# EAGLE board SparkFun_PiMicro-RP2040-Panel (EAGLE 9.6.2), part 1 of 6
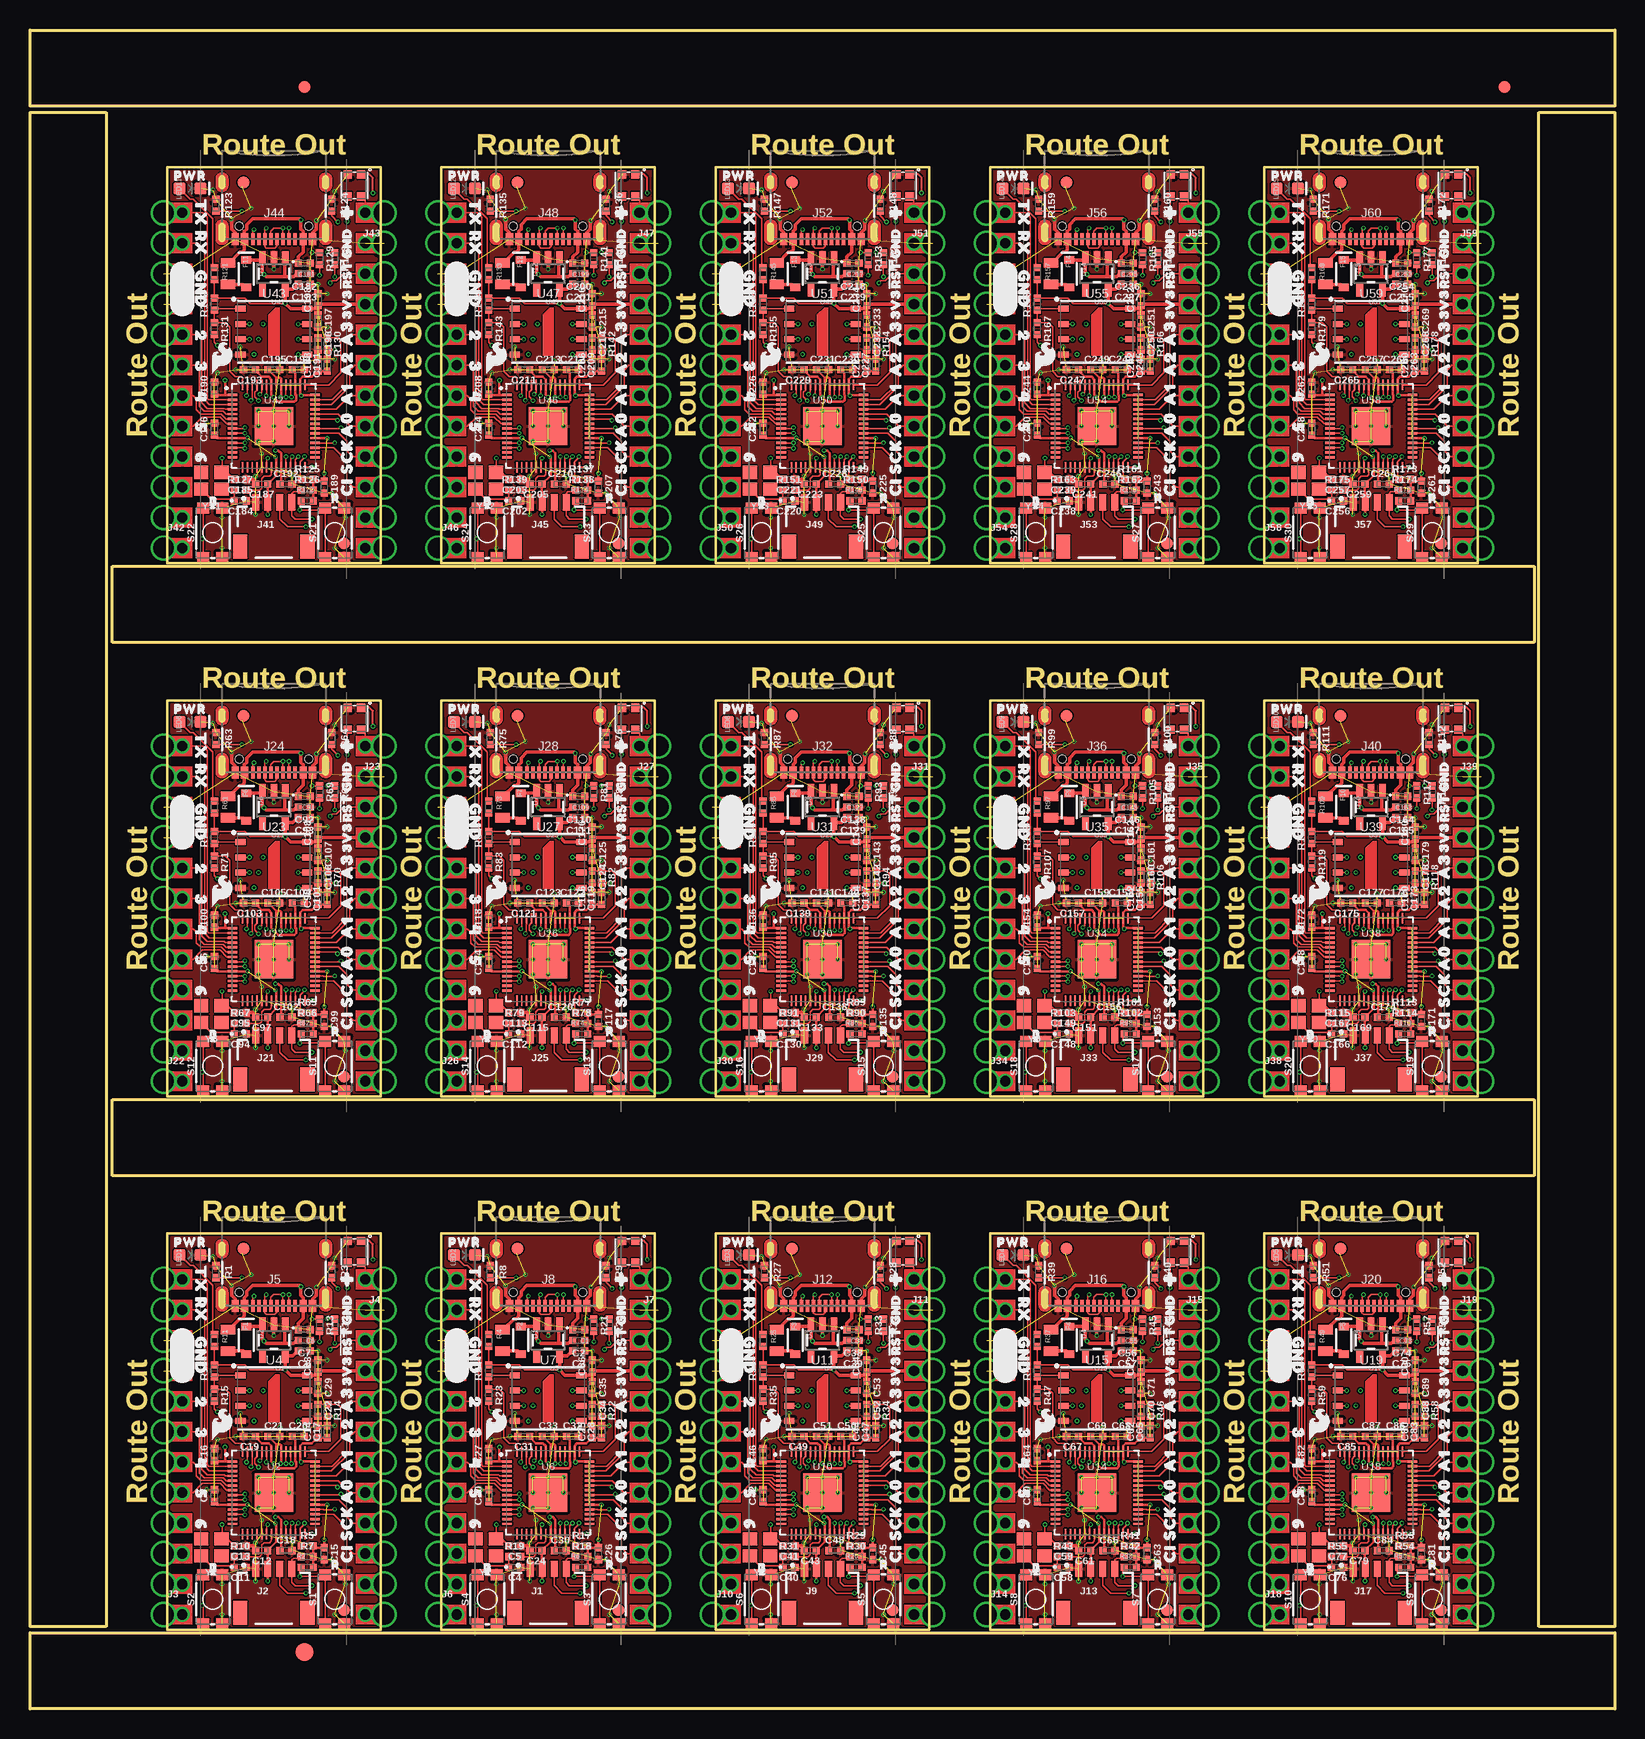
[diagram p0: board, top side]
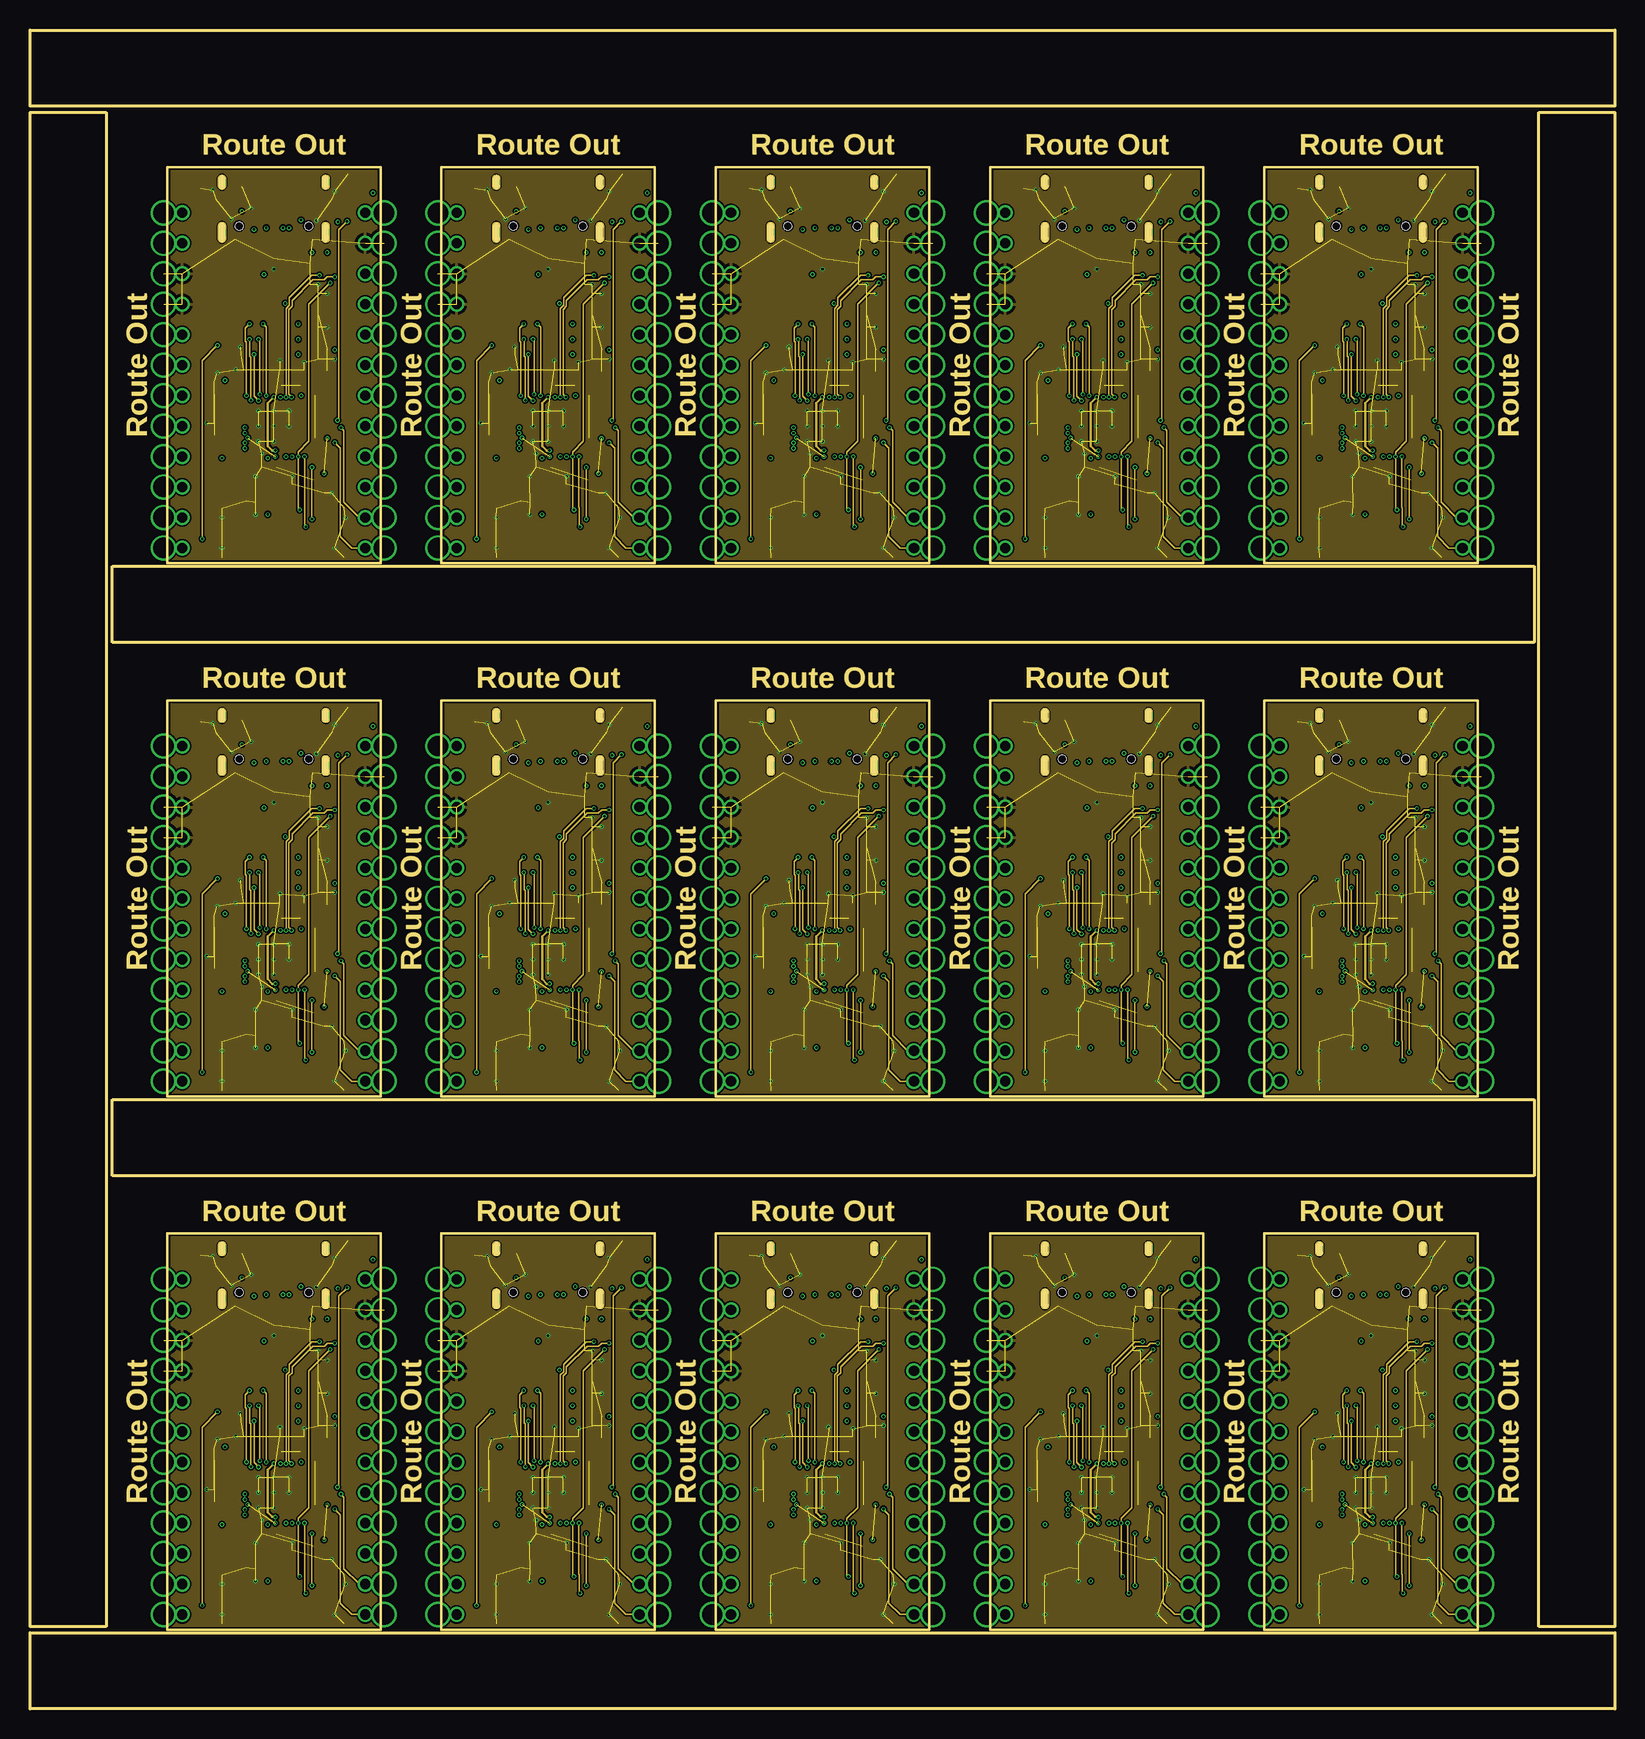
[diagram p1: board, inner layer Route2]
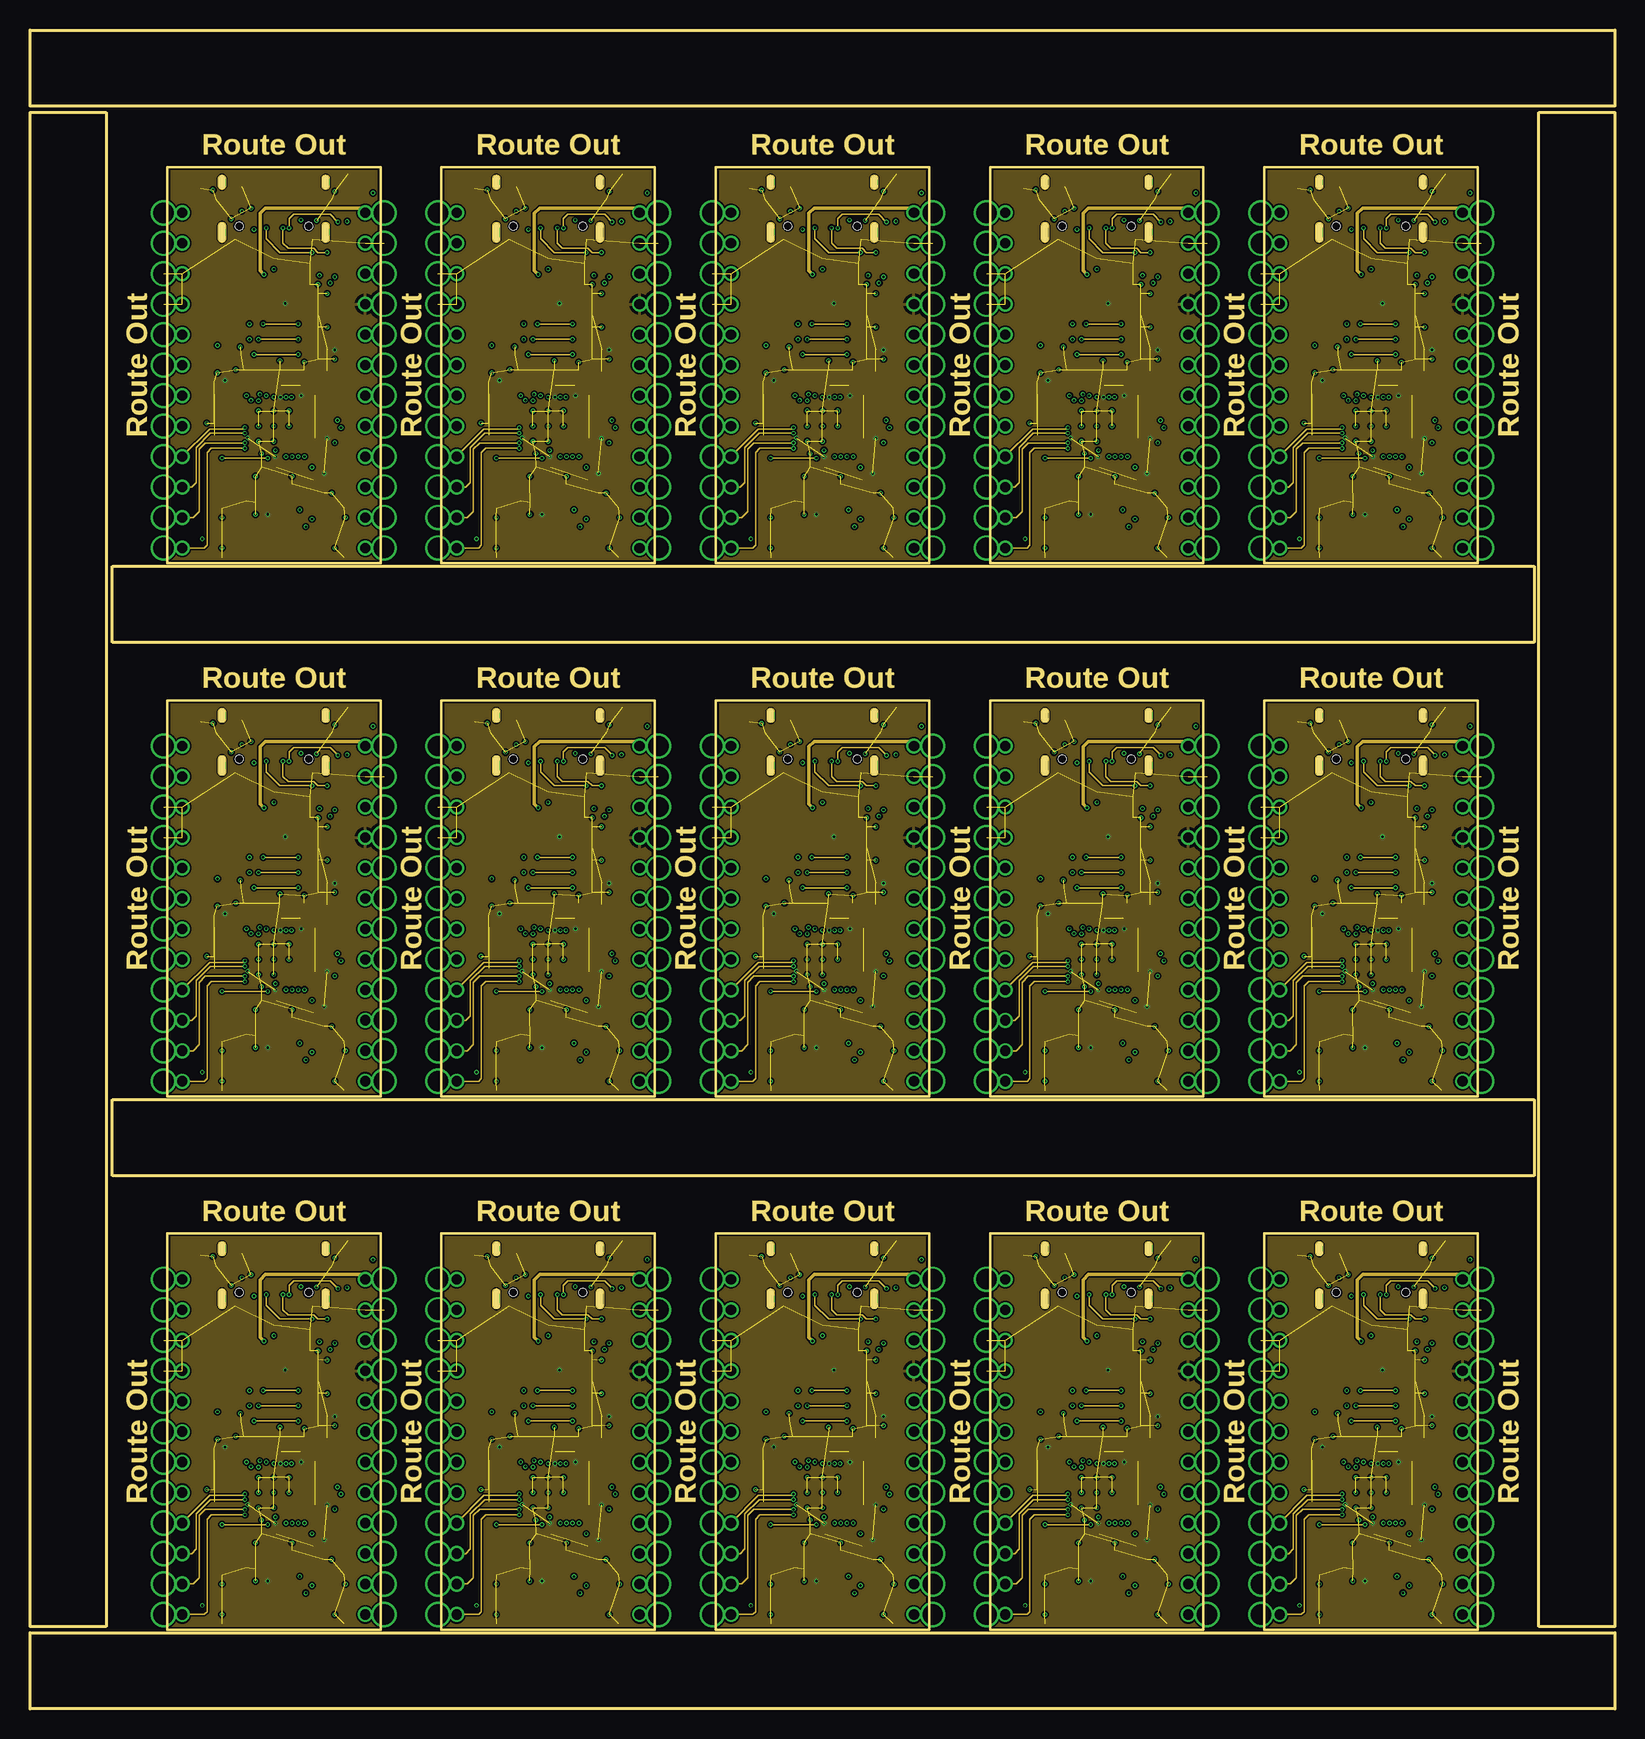
[diagram p2: board, inner layer Route15]
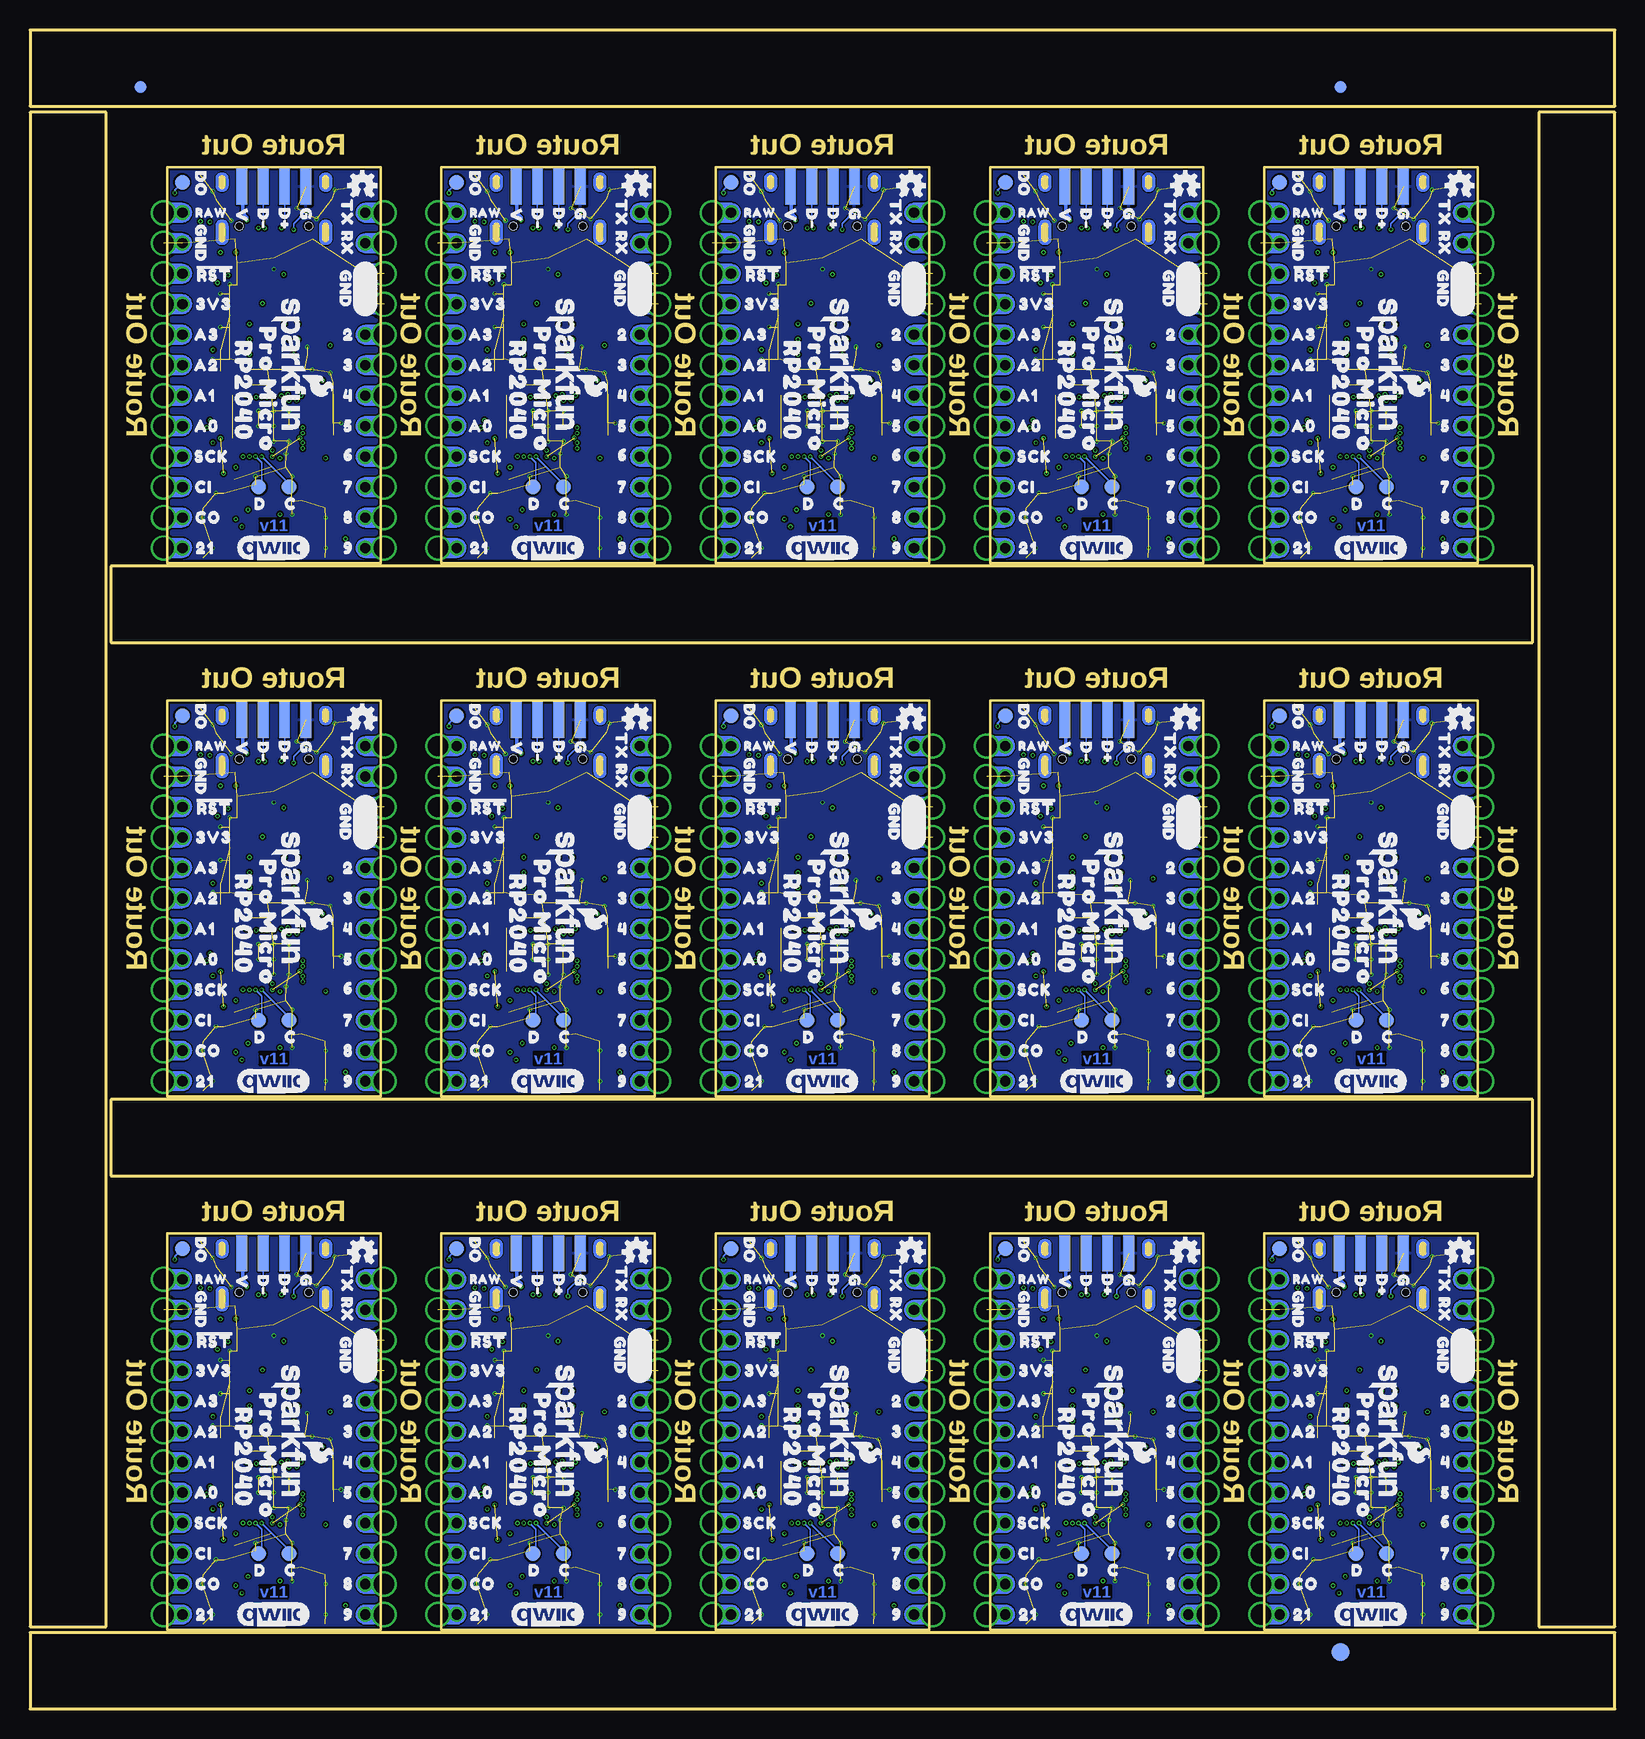
[diagram p3: board, bottom side, seen from below]

Size 132.08 x 139.95 mm. Coordinates in mm from the lower left corner, seen from the top.
Outline: 11.43,39.62 11.43,6.6 29.21,6.6 29.21,39.62 11.43,39.62
Outline: 34.29,39.62 34.29,6.6 52.07,6.6 52.07,39.62 34.29,39.62
Outline: 57.15,39.62 57.15,6.6 74.93,6.6 74.93,39.62 57.15,39.62
Outline: 80.01,39.62 80.01,6.6 97.79,6.6 97.79,39.62 80.01,39.62
Outline: 102.87,39.62 102.87,6.6 120.65,6.6 120.65,39.62 102.87,39.62
Outline: 11.43,84.07 11.43,51.05 29.21,51.05 29.21,84.07 11.43,84.07
Outline: 34.29,84.07 34.29,51.05 52.07,51.05 52.07,84.07 34.29,84.07
Outline: 57.15,84.07 57.15,51.05 74.93,51.05 74.93,84.07 57.15,84.07
Outline: 80.01,84.07 80.01,51.05 97.79,51.05 97.79,84.07 80.01,84.07
Outline: 102.87,84.07 102.87,51.05 120.65,51.05 120.65,84.07 102.87,84.07
Outline: 11.43,128.52 11.43,95.5 29.21,95.5 29.21,128.52 11.43,128.52
Outline: 34.29,128.52 34.29,95.5 52.07,95.5 52.07,128.52 34.29,128.52
Outline: 57.15,128.52 57.15,95.5 74.93,95.5 74.93,128.52 57.15,128.52
Outline: 80.01,128.52 80.01,95.5 97.79,95.5 97.79,128.52 80.01,128.52
Outline: 102.87,128.52 102.87,95.5 120.65,95.5 120.65,128.52 102.87,128.52
Outline: 0,6.35 132.08,6.35 132.08,0 0,0 0,6.35
Outline: 125.73,133.1 132.08,133.1 132.08,6.86 125.73,6.86 125.73,133.1
Outline: 0,139.95 132.08,139.95 132.08,133.6 0,133.6 0,139.95
Outline: 0,133.1 6.35,133.1 6.35,6.86 0,6.86 0,133.1
Outline: 6.86,50.8 125.35,50.8 125.35,44.45 6.86,44.45 6.86,50.8
Outline: 6.86,95.25 125.35,95.25 125.35,88.9 6.86,88.9 6.86,95.25
Copper layers (1+2*15+16): Top 0.035mm / dielectric 1.5mm / Route2 0.035mm / dielectric 0.15mm / Route15 0.035mm / dielectric 0.2mm / Bottom 0.035mm
Design rules "SparkFun_PiMicro-RP2040": minimum track width 4mil, minimum drill 0.2mm, track to track 4mil, track to pad 4mil, pad to pad 4mil, via to via 4mil, smd to smd 4mil, copper to edge 6mil, drill to drill 6mil, minimum pad ring 3mil, minimum via ring 3mil, stop-mask expansion 4mil, vias tented up to drill 25mil, thermal gap 10mil
Net classes: 1 Power: width 0.127 mm, clearance 0.178 mm

## Footprints (pad centres in the part's own frame; a part is rotated, then mirrored left to right if it is on the bottom)
0402-TIGHT = smd 0.6 x 0.6: 1 -0.5,0; 2 0.5,0
SOD-323 = smd 0.63 x 0.83: A 1.15,0; C -1.15,0
FIDUCIAL-1X2 = smd 1 x 1: 1 0,0
FIDUCIAL-1.5X3 = smd 1.5 x 1.5: 1 0,0
0805 = smd 0.8 x 1.2: 1 -0.9,0; 2 0.9,0
JST04_1MM_RA = smd 0.6 x 1.35: 1 -1.5,0; 2 -0.5,0; 3 0.5,0; 4 1.5,0 | smd 1.2 x 2: NC1 2.8,-3.675; NC2 -2.8,-3.675
1X12_CASTELLATED = drill 0.85 pad 1.016: 1 0,0; 2 0,2.54; 3 0,5.08; 4 0,7.62; 5 0,10.16; 6 0,12.7; 7 0,15.24; 8 0,17.78; 9 0,20.32; 10 0,22.86; 11 0,25.4; 12 0,27.94 | drill 1.7 pad 1.75: 1B -1.57,0; 2B -1.57,2.54; 3B -1.57,5.08; 4B -1.57,7.62; 5B -1.57,10.16; 6B -1.57,12.7; 7B -1.57,15.24; 8B -1.57,17.78; 9B -1.57,20.32; 10B -1.57,22.86; 11B -1.57,25.4; 12B -1.57,27.94
USB-C-16P_4LAYER-PADS = smd 0.3 x 1: A5 -1.25,-0.34; A6 -0.25,-0.34; A7 0.25,-0.34; A8 1.25,-0.34; B5 1.75,-0.34; B6 0.75,-0.34; B7 -0.75,-0.34; B8 -1.75,-0.34 | smd 0.6 x 1: GND -3.225,-0.34; GND2 3.225,-0.34; VBUS1 -2.45,-0.34; VBUS2 2.45,-0.34 | drill 0.4 pad 0.6 long: SHLD1 -4.318,-0.915; SHLD2 4.318,-0.915; SHLD3 -4.318,-5.095; SHLD4 4.318,-5.095 | hole 0.65: -2.89,-1.445; 2.89,-1.445
USB-SOLDER-PADS = smd 3 x 0.9: D+ 0,-0.889; D- 0,0.889; GND 0,-2.667; VBUS 0,2.667
LED-0603 = smd 1 x 1: A -0.877,0; C 0.877,0
TACTILE_SWITCH_SMD_4.6X2.8MM = smd 0.9 x 1: 1 -2.05,-0.8; 2 2.05,-0.8; 3 2.05,0.8; 4 -2.05,0.8
PAD.03X.05 = smd 1.27 x 1.27: P$1 0,0
SOT23-5 = smd 0.55 x 1.2: 1 -0.95,-1.3; 2 0,-1.3; 3 0.95,-1.3; 4 0.95,1.3; 5 -0.95,1.3
QFN-56 = smd 0.875 x 0.2: 1 -3.437,2.6; 2 -3.437,2.2; 3 -3.437,1.8; 4 -3.437,1.4; 5 -3.437,1; 6 -3.437,0.6; 7 -3.437,0.2; 8 -3.437,-0.2; 9 -3.437,-0.6; 10 -3.437,-1; 11 -3.437,-1.4; 12 -3.437,-1.8; 13 -3.437,-2.2; 14 -3.437,-2.6; 29 3.437,-2.6; 30 3.437,-2.2; 31 3.437,-1.8; 32 3.437,-1.4; 33 3.437,-1; 34 3.437,-0.6; 35 3.437,-0.2; 36 3.437,0.2; 37 3.437,0.6; 38 3.437,1; 39 3.437,1.4; 40 3.437,1.8; 41 3.437,2.2; 42 3.437,2.6 | smd 0.2 x 0.875: 15 -2.6,-3.437; 16 -2.2,-3.437; 17 -1.8,-3.437; 18 -1.4,-3.437; 19 -1,-3.437; 20 -0.6,-3.437; 21 -0.2,-3.437; 22 0.2,-3.437; 23 0.6,-3.437; 24 1,-3.437; 25 1.4,-3.437; 26 1.8,-3.437; 27 2.2,-3.437; 28 2.6,-3.437; 43 2.6,3.437; 44 2.2,3.437; 45 1.8,3.437; 46 1.4,3.437; 47 1,3.437; 48 0.6,3.437; 49 0.2,3.437; 50 -0.2,3.437; 51 -0.6,3.437; 52 -1,3.437; 53 -1.4,3.437; 54 -1.8,3.437; 55 -2.2,3.437; 56 -2.6,3.437 | smd 3.2 x 3.2: EPAD 0,0
WS2812-2020 = smd 0.7 x 0.7: 1 0.915,-0.55; 2 0.915,0.55; 3 -0.915,0.55; 4 -0.915,-0.55
WSON-8-6X5-SKINNY_CENTERPAD = smd 0.85 x 0.5: 1 -2.775,1.905; 2 -2.775,0.635; 3 -2.775,-0.635; 4 -2.775,-1.905; 5 2.775,-1.905; 6 2.775,-0.635; 7 2.775,0.635; 8 2.775,1.905
CRYSTAL-SMD-2X2.5MM = smd 1.2 x 1.1: P1 0.846,0.69; P2 -0.854,0.69; P3 -0.854,-0.71; P4 0.846,-0.71

## Placement (x,y rotation side)
C1  1.0uF  [0402-TIGHT]  45.72,31.62 180 top
C2  10uF  [0402-TIGHT]  45.72,30.73 180 top
C3  10uF  [0402-TIGHT]  45.72,29.84 180 top
C4  15pF  [0402-TIGHT]  40.39,11.81 180 top
C5  15pF  [0402-TIGHT]  40.39,13.59 180 top
C6  1.0uF  [0402-TIGHT]  22.86,31.62 180 top
C7  10uF  [0402-TIGHT]  22.86,30.73 180 top
C8  10uF  [0402-TIGHT]  22.86,29.84 180 top
C9  0.1uF  [0402-TIGHT]  15.37,17.78 90 top
C10  0.1uF  [0402-TIGHT]  38.23,17.78 90 top
C11  15pF  [0402-TIGHT]  17.53,11.81 180 top
C12  0.1uF  [0402-TIGHT]  19.3,13.21 180 top
C13  15pF  [0402-TIGHT]  17.53,13.59 180 top
C14  0.1uF  [0402-TIGHT]  24,23.11 90 top
C15  0.1uF  [0402-TIGHT]  24.51,12.95 270 top
C16  0.1uF  [0402-TIGHT]  15.37,21.21 90 top
C17  0.1uF  [0402-TIGHT]  24.77,23.11 90 top
C18  0.1uF  [0402-TIGHT]  21.34,13.21 0 top
C19  0.1uF  [0402-TIGHT]  18.29,22.73 180 top
C20  2.2uF  [0402-TIGHT]  22.35,22.73 0 top
C21  2.2uF  [0402-TIGHT]  20.32,22.73 0 top
C22  2.2uF  [0402-TIGHT]  24,24.89 270 top
C23  2.2uF  [0402-TIGHT]  24,28.57 90 top
C24  0.1uF  [0402-TIGHT]  42.16,13.21 180 top
C25  0.1uF  [0402-TIGHT]  46.86,23.11 90 top
C26  0.1uF  [0402-TIGHT]  47.37,12.95 270 top
C27  0.1uF  [0402-TIGHT]  38.23,21.21 90 top
C28  0.1uF  [0402-TIGHT]  47.62,23.11 90 top
C29  0.1uF  [0402-TIGHT]  24,26.8 270 top
C30  0.1uF  [0402-TIGHT]  44.2,13.21 0 top
C31  0.1uF  [0402-TIGHT]  41.15,22.73 180 top
C32  2.2uF  [0402-TIGHT]  45.21,22.73 0 top
C33  2.2uF  [0402-TIGHT]  43.18,22.73 0 top
C34  2.2uF  [0402-TIGHT]  46.86,24.89 270 top
C35  0.1uF  [0402-TIGHT]  46.86,26.8 270 top
C36  2.2uF  [0402-TIGHT]  46.86,28.57 90 top
C37  1.0uF  [0402-TIGHT]  68.58,31.62 180 top
C38  10uF  [0402-TIGHT]  68.58,30.73 180 top
C39  10uF  [0402-TIGHT]  68.58,29.84 180 top
C40  15pF  [0402-TIGHT]  63.25,11.81 180 top
C41  15pF  [0402-TIGHT]  63.25,13.59 180 top
C42  0.1uF  [0402-TIGHT]  61.09,17.78 90 top
C43  0.1uF  [0402-TIGHT]  65.02,13.21 180 top
C44  0.1uF  [0402-TIGHT]  69.72,23.11 90 top
C45  0.1uF  [0402-TIGHT]  70.23,12.95 270 top
C46  0.1uF  [0402-TIGHT]  61.09,21.21 90 top
C47  0.1uF  [0402-TIGHT]  70.48,23.11 90 top
C48  0.1uF  [0402-TIGHT]  67.06,13.21 0 top
C49  0.1uF  [0402-TIGHT]  64.01,22.73 180 top
C50  2.2uF  [0402-TIGHT]  68.07,22.73 0 top
C51  2.2uF  [0402-TIGHT]  66.04,22.73 0 top
C52  2.2uF  [0402-TIGHT]  69.72,24.89 270 top
C53  0.1uF  [0402-TIGHT]  69.72,26.8 270 top
C54  2.2uF  [0402-TIGHT]  69.72,28.57 90 top
C55  1.0uF  [0402-TIGHT]  91.44,31.62 180 top
C56  10uF  [0402-TIGHT]  91.44,30.73 180 top
C57  10uF  [0402-TIGHT]  91.44,29.84 180 top
C58  15pF  [0402-TIGHT]  86.11,11.81 180 top
C59  15pF  [0402-TIGHT]  86.11,13.59 180 top
C60  0.1uF  [0402-TIGHT]  83.95,17.78 90 top
C61  0.1uF  [0402-TIGHT]  87.88,13.21 180 top
C62  0.1uF  [0402-TIGHT]  92.58,23.11 90 top
C63  0.1uF  [0402-TIGHT]  93.09,12.95 270 top
C64  0.1uF  [0402-TIGHT]  83.95,21.21 90 top
C65  0.1uF  [0402-TIGHT]  93.34,23.11 90 top
C66  0.1uF  [0402-TIGHT]  89.92,13.21 0 top
C67  0.1uF  [0402-TIGHT]  86.87,22.73 180 top
C68  2.2uF  [0402-TIGHT]  90.93,22.73 0 top
C69  2.2uF  [0402-TIGHT]  88.9,22.73 0 top
C70  2.2uF  [0402-TIGHT]  92.58,24.89 270 top
C71  0.1uF  [0402-TIGHT]  92.58,26.8 270 top
C72  2.2uF  [0402-TIGHT]  92.58,28.57 90 top
C73  1.0uF  [0402-TIGHT]  114.3,31.62 180 top
C74  10uF  [0402-TIGHT]  114.3,30.73 180 top
C75  10uF  [0402-TIGHT]  114.3,29.84 180 top
C76  15pF  [0402-TIGHT]  108.97,11.81 180 top
C77  15pF  [0402-TIGHT]  108.97,13.59 180 top
C78  0.1uF  [0402-TIGHT]  106.81,17.78 90 top
C79  0.1uF  [0402-TIGHT]  110.74,13.21 180 top
C80  0.1uF  [0402-TIGHT]  115.44,23.11 90 top
C81  0.1uF  [0402-TIGHT]  115.95,12.95 270 top
C82  0.1uF  [0402-TIGHT]  106.81,21.21 90 top
C83  0.1uF  [0402-TIGHT]  116.21,23.11 90 top
C84  0.1uF  [0402-TIGHT]  112.78,13.21 0 top
C85  0.1uF  [0402-TIGHT]  109.73,22.73 180 top
C86  2.2uF  [0402-TIGHT]  113.79,22.73 0 top
C87  2.2uF  [0402-TIGHT]  111.76,22.73 0 top
C88  2.2uF  [0402-TIGHT]  115.44,24.89 270 top
C89  0.1uF  [0402-TIGHT]  115.44,26.8 270 top
C90  2.2uF  [0402-TIGHT]  115.44,28.57 90 top
C91  1.0uF  [0402-TIGHT]  22.86,76.07 180 top
C92  10uF  [0402-TIGHT]  22.86,75.18 180 top
C93  10uF  [0402-TIGHT]  22.86,74.3 180 top
C94  15pF  [0402-TIGHT]  17.53,56.26 180 top
C95  15pF  [0402-TIGHT]  17.53,58.04 180 top
C96  0.1uF  [0402-TIGHT]  15.37,62.23 90 top
C97  0.1uF  [0402-TIGHT]  19.3,57.66 180 top
C98  0.1uF  [0402-TIGHT]  24,67.56 90 top
C99  0.1uF  [0402-TIGHT]  24.51,57.4 270 top
C100  0.1uF  [0402-TIGHT]  15.37,65.66 90 top
C101  0.1uF  [0402-TIGHT]  24.77,67.56 90 top
C102  0.1uF  [0402-TIGHT]  21.34,57.66 0 top
C103  0.1uF  [0402-TIGHT]  18.29,67.18 180 top
C104  2.2uF  [0402-TIGHT]  22.35,67.18 0 top
C105  2.2uF  [0402-TIGHT]  20.32,67.18 0 top
C106  2.2uF  [0402-TIGHT]  24,69.34 270 top
C107  0.1uF  [0402-TIGHT]  24,71.25 270 top
C108  2.2uF  [0402-TIGHT]  24,73.03 90 top
C109  1.0uF  [0402-TIGHT]  45.72,76.07 180 top
C110  10uF  [0402-TIGHT]  45.72,75.18 180 top
C111  10uF  [0402-TIGHT]  45.72,74.3 180 top
C112  15pF  [0402-TIGHT]  40.39,56.26 180 top
C113  15pF  [0402-TIGHT]  40.39,58.04 180 top
C114  0.1uF  [0402-TIGHT]  38.23,62.23 90 top
C115  0.1uF  [0402-TIGHT]  42.16,57.66 180 top
C116  0.1uF  [0402-TIGHT]  46.86,67.56 90 top
C117  0.1uF  [0402-TIGHT]  47.37,57.4 270 top
C118  0.1uF  [0402-TIGHT]  38.23,65.66 90 top
C119  0.1uF  [0402-TIGHT]  47.62,67.56 90 top
C120  0.1uF  [0402-TIGHT]  44.2,57.66 0 top
C121  0.1uF  [0402-TIGHT]  41.15,67.18 180 top
C122  2.2uF  [0402-TIGHT]  45.21,67.18 0 top
C123  2.2uF  [0402-TIGHT]  43.18,67.18 0 top
C124  2.2uF  [0402-TIGHT]  46.86,69.34 270 top
C125  0.1uF  [0402-TIGHT]  46.86,71.25 270 top
C126  2.2uF  [0402-TIGHT]  46.86,73.03 90 top
C127  1.0uF  [0402-TIGHT]  68.58,76.07 180 top
C128  10uF  [0402-TIGHT]  68.58,75.18 180 top
C129  10uF  [0402-TIGHT]  68.58,74.3 180 top
C130  15pF  [0402-TIGHT]  63.25,56.26 180 top
C131  15pF  [0402-TIGHT]  63.25,58.04 180 top
C132  0.1uF  [0402-TIGHT]  61.09,62.23 90 top
C133  0.1uF  [0402-TIGHT]  65.02,57.66 180 top
C134  0.1uF  [0402-TIGHT]  69.72,67.56 90 top
C135  0.1uF  [0402-TIGHT]  70.23,57.4 270 top
C136  0.1uF  [0402-TIGHT]  61.09,65.66 90 top
C137  0.1uF  [0402-TIGHT]  70.48,67.56 90 top
C138  0.1uF  [0402-TIGHT]  67.06,57.66 0 top
C139  0.1uF  [0402-TIGHT]  64.01,67.18 180 top
C140  2.2uF  [0402-TIGHT]  68.07,67.18 0 top
C141  2.2uF  [0402-TIGHT]  66.04,67.18 0 top
C142  2.2uF  [0402-TIGHT]  69.72,69.34 270 top
C143  0.1uF  [0402-TIGHT]  69.72,71.25 270 top
C144  2.2uF  [0402-TIGHT]  69.72,73.03 90 top
C145  1.0uF  [0402-TIGHT]  91.44,76.07 180 top
C146  10uF  [0402-TIGHT]  91.44,75.18 180 top
C147  10uF  [0402-TIGHT]  91.44,74.3 180 top
C148  15pF  [0402-TIGHT]  86.11,56.26 180 top
C149  15pF  [0402-TIGHT]  86.11,58.04 180 top
C150  0.1uF  [0402-TIGHT]  83.95,62.23 90 top
C151  0.1uF  [0402-TIGHT]  87.88,57.66 180 top
C152  0.1uF  [0402-TIGHT]  92.58,67.56 90 top
C153  0.1uF  [0402-TIGHT]  93.09,57.4 270 top
C154  0.1uF  [0402-TIGHT]  83.95,65.66 90 top
C155  0.1uF  [0402-TIGHT]  93.34,67.56 90 top
C156  0.1uF  [0402-TIGHT]  89.92,57.66 0 top
C157  0.1uF  [0402-TIGHT]  86.87,67.18 180 top
C158  2.2uF  [0402-TIGHT]  90.93,67.18 0 top
C159  2.2uF  [0402-TIGHT]  88.9,67.18 0 top
C160  2.2uF  [0402-TIGHT]  92.58,69.34 270 top
C161  0.1uF  [0402-TIGHT]  92.58,71.25 270 top
C162  2.2uF  [0402-TIGHT]  92.58,73.03 90 top
C163  1.0uF  [0402-TIGHT]  114.3,76.07 180 top
C164  10uF  [0402-TIGHT]  114.3,75.18 180 top
C165  10uF  [0402-TIGHT]  114.3,74.3 180 top
C166  15pF  [0402-TIGHT]  108.97,56.26 180 top
C167  15pF  [0402-TIGHT]  108.97,58.04 180 top
C168  0.1uF  [0402-TIGHT]  106.81,62.23 90 top
C169  0.1uF  [0402-TIGHT]  110.74,57.66 180 top
C170  0.1uF  [0402-TIGHT]  115.44,67.56 90 top
C171  0.1uF  [0402-TIGHT]  115.95,57.4 270 top
C172  0.1uF  [0402-TIGHT]  106.81,65.66 90 top
C173  0.1uF  [0402-TIGHT]  116.21,67.56 90 top
C174  0.1uF  [0402-TIGHT]  112.78,57.66 0 top
C175  0.1uF  [0402-TIGHT]  109.73,67.18 180 top
C176  2.2uF  [0402-TIGHT]  113.79,67.18 0 top
C177  2.2uF  [0402-TIGHT]  111.76,67.18 0 top
C178  2.2uF  [0402-TIGHT]  115.44,69.34 270 top
C179  0.1uF  [0402-TIGHT]  115.44,71.25 270 top
C180  2.2uF  [0402-TIGHT]  115.44,73.03 90 top
C181  1.0uF  [0402-TIGHT]  22.86,120.52 180 top
C182  10uF  [0402-TIGHT]  22.86,119.63 180 top
C183  10uF  [0402-TIGHT]  22.86,118.75 180 top
C184  15pF  [0402-TIGHT]  17.53,100.71 180 top
C185  15pF  [0402-TIGHT]  17.53,102.49 180 top
C186  0.1uF  [0402-TIGHT]  15.37,106.68 90 top
C187  0.1uF  [0402-TIGHT]  19.3,102.11 180 top
C188  0.1uF  [0402-TIGHT]  24,112.01 90 top
C189  0.1uF  [0402-TIGHT]  24.51,101.85 270 top
C190  0.1uF  [0402-TIGHT]  15.37,110.11 90 top
C191  0.1uF  [0402-TIGHT]  24.77,112.01 90 top
C192  0.1uF  [0402-TIGHT]  21.34,102.11 0 top
C193  0.1uF  [0402-TIGHT]  18.29,111.63 180 top
C194  2.2uF  [0402-TIGHT]  22.35,111.63 0 top
C195  2.2uF  [0402-TIGHT]  20.32,111.63 0 top
C196  2.2uF  [0402-TIGHT]  24,113.79 270 top
C197  0.1uF  [0402-TIGHT]  24,115.7 270 top
C198  2.2uF  [0402-TIGHT]  24,117.47 90 top
C199  1.0uF  [0402-TIGHT]  45.72,120.52 180 top
C200  10uF  [0402-TIGHT]  45.72,119.63 180 top
C201  10uF  [0402-TIGHT]  45.72,118.75 180 top
C202  15pF  [0402-TIGHT]  40.39,100.71 180 top
C203  15pF  [0402-TIGHT]  40.39,102.49 180 top
C204  0.1uF  [0402-TIGHT]  38.23,106.68 90 top
C205  0.1uF  [0402-TIGHT]  42.16,102.11 180 top
C206  0.1uF  [0402-TIGHT]  46.86,112.01 90 top
C207  0.1uF  [0402-TIGHT]  47.37,101.85 270 top
C208  0.1uF  [0402-TIGHT]  38.23,110.11 90 top
C209  0.1uF  [0402-TIGHT]  47.62,112.01 90 top
C210  0.1uF  [0402-TIGHT]  44.2,102.11 0 top
C211  0.1uF  [0402-TIGHT]  41.15,111.63 180 top
C212  2.2uF  [0402-TIGHT]  45.21,111.63 0 top
C213  2.2uF  [0402-TIGHT]  43.18,111.63 0 top
C214  2.2uF  [0402-TIGHT]  46.86,113.79 270 top
C215  0.1uF  [0402-TIGHT]  46.86,115.7 270 top
C216  2.2uF  [0402-TIGHT]  46.86,117.47 90 top
C217  1.0uF  [0402-TIGHT]  68.58,120.52 180 top
C218  10uF  [0402-TIGHT]  68.58,119.63 180 top
C219  10uF  [0402-TIGHT]  68.58,118.75 180 top
C220  15pF  [0402-TIGHT]  63.25,100.71 180 top
C221  15pF  [0402-TIGHT]  63.25,102.49 180 top
C222  0.1uF  [0402-TIGHT]  61.09,106.68 90 top
C223  0.1uF  [0402-TIGHT]  65.02,102.11 180 top
C224  0.1uF  [0402-TIGHT]  69.72,112.01 90 top
C225  0.1uF  [0402-TIGHT]  70.23,101.85 270 top
C226  0.1uF  [0402-TIGHT]  61.09,110.11 90 top
C227  0.1uF  [0402-TIGHT]  70.48,112.01 90 top
C228  0.1uF  [0402-TIGHT]  67.06,102.11 0 top
C229  0.1uF  [0402-TIGHT]  64.01,111.63 180 top
C230  2.2uF  [0402-TIGHT]  68.07,111.63 0 top
C231  2.2uF  [0402-TIGHT]  66.04,111.63 0 top
C232  2.2uF  [0402-TIGHT]  69.72,113.79 270 top
C233  0.1uF  [0402-TIGHT]  69.72,115.7 270 top
C234  2.2uF  [0402-TIGHT]  69.72,117.47 90 top
C235  1.0uF  [0402-TIGHT]  91.44,120.52 180 top
C236  10uF  [0402-TIGHT]  91.44,119.63 180 top
C237  10uF  [0402-TIGHT]  91.44,118.75 180 top
C238  15pF  [0402-TIGHT]  86.11,100.71 180 top
C239  15pF  [0402-TIGHT]  86.11,102.49 180 top
C240  0.1uF  [0402-TIGHT]  83.95,106.68 90 top
C241  0.1uF  [0402-TIGHT]  87.88,102.11 180 top
C242  0.1uF  [0402-TIGHT]  92.58,112.01 90 top
C243  0.1uF  [0402-TIGHT]  93.09,101.85 270 top
C244  0.1uF  [0402-TIGHT]  83.95,110.11 90 top
C245  0.1uF  [0402-TIGHT]  93.34,112.01 90 top
C246  0.1uF  [0402-TIGHT]  89.92,102.11 0 top
C247  0.1uF  [0402-TIGHT]  86.87,111.63 180 top
C248  2.2uF  [0402-TIGHT]  90.93,111.63 0 top
C249  2.2uF  [0402-TIGHT]  88.9,111.63 0 top
C250  2.2uF  [0402-TIGHT]  92.58,113.79 270 top
C251  0.1uF  [0402-TIGHT]  92.58,115.7 270 top
C252  2.2uF  [0402-TIGHT]  92.58,117.47 90 top
C253  1.0uF  [0402-TIGHT]  114.3,120.52 180 top
C254  10uF  [0402-TIGHT]  114.3,119.63 180 top
C255  10uF  [0402-TIGHT]  114.3,118.75 180 top
C256  15pF  [0402-TIGHT]  108.97,100.71 180 top
C257  15pF  [0402-TIGHT]  108.97,102.49 180 top
C258  0.1uF  [0402-TIGHT]  106.81,106.68 90 top
C259  0.1uF  [0402-TIGHT]  110.74,102.11 180 top
C260  0.1uF  [0402-TIGHT]  115.44,112.01 90 top
C261  0.1uF  [0402-TIGHT]  115.95,101.85 270 top
C262  0.1uF  [0402-TIGHT]  106.81,110.11 90 top
C263  0.1uF  [0402-TIGHT]  116.21,112.01 90 top
C264  0.1uF  [0402-TIGHT]  112.78,102.11 0 top
C265  0.1uF  [0402-TIGHT]  109.73,111.63 180 top
C266  2.2uF  [0402-TIGHT]  113.79,111.63 0 top
C267  2.2uF  [0402-TIGHT]  111.76,111.63 0 top
C268  2.2uF  [0402-TIGHT]  115.44,113.79 270 top
C269  0.1uF  [0402-TIGHT]  115.44,115.7 270 top
C270  2.2uF  [0402-TIGHT]  115.44,117.47 90 top
D1  3A/10V/280mV  [SOD-323]  40.89,30.73 270 top
D2  3A/10V/280mV  [SOD-323]  18.03,30.73 270 top
D3  3A/10V/280mV  [SOD-323]  63.75,30.73 270 top
D4  3A/10V/280mV  [SOD-323]  86.61,30.73 270 top
D5  3A/10V/280mV  [SOD-323]  109.47,30.73 270 top
D6  3A/10V/280mV  [SOD-323]  18.03,75.18 270 top
D7  3A/10V/280mV  [SOD-323]  40.89,75.18 270 top
D8  3A/10V/280mV  [SOD-323]  63.75,75.18 270 top
D9  3A/10V/280mV  [SOD-323]  86.61,75.18 270 top
D10  3A/10V/280mV  [SOD-323]  109.47,75.18 270 top
D11  3A/10V/280mV  [SOD-323]  18.03,119.63 270 top
D12  3A/10V/280mV  [SOD-323]  40.89,119.63 270 top
D13  3A/10V/280mV  [SOD-323]  63.75,119.63 270 top
D14  3A/10V/280mV  [SOD-323]  86.61,119.63 270 top
D15  3A/10V/280mV  [SOD-323]  109.47,119.63 270 top
E$1  [FIDUCIAL-1X2]  22.86,135.19 0 top
E$2  [FIDUCIAL-1X2]  22.86,135.19 0 bottom
E$3  [FIDUCIAL-1X2]  122.87,135.19 0 top
E$4  [FIDUCIAL-1X2]  122.87,135.19 0 bottom
E$5  [FIDUCIAL-1.5X3]  22.86,4.76 0 top
E$6  [FIDUCIAL-1.5X3]  22.86,4.76 0 bottom
F1  6V 0.5A  [0805]  16.51,30.73 270 top
F2  6V 0.5A  [0805]  39.37,30.73 270 top
F3  6V 0.5A  [0805]  62.23,30.73 270 top
F4  6V 0.5A  [0805]  85.09,30.73 270 top
F5  6V 0.5A  [0805]  107.95,30.73 270 top
F6  6V 0.5A  [0805]  16.51,75.18 270 top
F7  6V 0.5A  [0805]  39.37,75.18 270 top
F8  6V 0.5A  [0805]  62.23,75.18 270 top
F9  6V 0.5A  [0805]  85.09,75.18 270 top
F10  6V 0.5A  [0805]  107.95,75.18 270 top
F11  6V 0.5A  [0805]  16.51,119.63 270 top
F12  6V 0.5A  [0805]  39.37,119.63 270 top
F13  6V 0.5A  [0805]  62.23,119.63 270 top
F14  6V 0.5A  [0805]  85.09,119.63 270 top
F15  6V 0.5A  [0805]  107.95,119.63 270 top
J1  Qwiic  [JST04_1MM_RA]  43.18,11.68 0 top
J2  Qwiic  [JST04_1MM_RA]  20.32,11.68 0 top
J3  [1X12_CASTELLATED]  12.7,7.87 0 top
J4  [1X12_CASTELLATED]  27.94,35.81 180 top
J5  USB Female Type C Connector  [USB-C-16P_4LAYER-PADS]  20.32,33.27 180 top
J6  [1X12_CASTELLATED]  35.56,7.87 0 top
J7  [1X12_CASTELLATED]  50.8,35.81 180 top
J8  USB Female Type C Connector  [USB-C-16P_4LAYER-PADS]  43.18,33.27 180 top
J9  Qwiic  [JST04_1MM_RA]  66.04,11.68 0 top
J10  [1X12_CASTELLATED]  58.42,7.87 0 top
J11  [1X12_CASTELLATED]  73.66,35.81 180 top
J12  USB Female Type C Connector  [USB-C-16P_4LAYER-PADS]  66.04,33.27 180 top
J13  Qwiic  [JST04_1MM_RA]  88.9,11.68 0 top
J14  [1X12_CASTELLATED]  81.28,7.87 0 top
J15  [1X12_CASTELLATED]  96.52,35.81 180 top
J16  USB Female Type C Connector  [USB-C-16P_4LAYER-PADS]  88.9,33.27 180 top
J17  Qwiic  [JST04_1MM_RA]  111.76,11.68 0 top
J18  [1X12_CASTELLATED]  104.14,7.87 0 top
J19  [1X12_CASTELLATED]  119.38,35.81 180 top
J20  USB Female Type C Connector  [USB-C-16P_4LAYER-PADS]  111.76,33.27 180 top
J21  Qwiic  [JST04_1MM_RA]  20.32,56.13 0 top
J22  [1X12_CASTELLATED]  12.7,52.32 0 top
J23  [1X12_CASTELLATED]  27.94,80.26 180 top
J24  USB Female Type C Connector  [USB-C-16P_4LAYER-PADS]  20.32,77.72 180 top
J25  Qwiic  [JST04_1MM_RA]  43.18,56.13 0 top
J26  [1X12_CASTELLATED]  35.56,52.32 0 top
J27  [1X12_CASTELLATED]  50.8,80.26 180 top
J28  USB Female Type C Connector  [USB-C-16P_4LAYER-PADS]  43.18,77.72 180 top
J29  Qwiic  [JST04_1MM_RA]  66.04,56.13 0 top
J30  [1X12_CASTELLATED]  58.42,52.32 0 top
J31  [1X12_CASTELLATED]  73.66,80.26 180 top
J32  USB Female Type C Connector  [USB-C-16P_4LAYER-PADS]  66.04,77.72 180 top
J33  Qwiic  [JST04_1MM_RA]  88.9,56.13 0 top
J34  [1X12_CASTELLATED]  81.28,52.32 0 top
J35  [1X12_CASTELLATED]  96.52,80.26 180 top
J36  USB Female Type C Connector  [USB-C-16P_4LAYER-PADS]  88.9,77.72 180 top
J37  Qwiic  [JST04_1MM_RA]  111.76,56.13 0 top
J38  [1X12_CASTELLATED]  104.14,52.32 0 top
J39  [1X12_CASTELLATED]  119.38,80.26 180 top
J40  USB Female Type C Connector  [USB-C-16P_4LAYER-PADS]  111.76,77.72 180 top
J41  Qwiic  [JST04_1MM_RA]  20.32,100.58 0 top
J42  [1X12_CASTELLATED]  12.7,96.77 0 top
J43  [1X12_CASTELLATED]  27.94,124.71 180 top
J44  USB Female Type C Connector  [USB-C-16P_4LAYER-PADS]  20.32,122.17 180 top
J45  Qwiic  [JST04_1MM_RA]  43.18,100.58 0 top
J46  [1X12_CASTELLATED]  35.56,96.77 0 top
J47  [1X12_CASTELLATED]  50.8,124.71 180 top
J48  USB Female Type C Connector  [USB-C-16P_4LAYER-PADS]  43.18,122.17 180 top
J49  Qwiic  [JST04_1MM_RA]  66.04,100.58 0 top
J50  [1X12_CASTELLATED]  58.42,96.77 0 top
J51  [1X12_CASTELLATED]  73.66,124.71 180 top
J52  USB Female Type C Connector  [USB-C-16P_4LAYER-PADS]  66.04,122.17 180 top
J53  Qwiic  [JST04_1MM_RA]  88.9,100.58 0 top
J54  [1X12_CASTELLATED]  81.28,96.77 0 top
J55  [1X12_CASTELLATED]  96.52,124.71 180 top
J56  USB Female Type C Connector  [USB-C-16P_4LAYER-PADS]  88.9,122.17 180 top
J57  Qwiic  [JST04_1MM_RA]  111.76,100.58 0 top
J58  [1X12_CASTELLATED]  104.14,96.77 0 top
J59  [1X12_CASTELLATED]  119.38,124.71 180 top
J60  USB Female Type C Connector  [USB-C-16P_4LAYER-PADS]  111.76,122.17 180 top
JP1  FIDUCIAL1X2  [FIDUCIAL-1X2]  26.16,8.26 0 top
JP2  FIDUCIAL1X2  [FIDUCIAL-1X2]  17.78,38.35 0 top
JP3  FIDUCIAL1X2  [FIDUCIAL-1X2]  49.02,8.26 0 top
JP4  FIDUCIAL1X2  [FIDUCIAL-1X2]  40.64,38.35 0 top
JP5  USB_SOLDER_PADS  [USB-SOLDER-PADS]  43.18,37.97 90 bottom
JP6  FIDUCIAL1X2  [FIDUCIAL-1X2]  71.88,8.26 0 top
JP7  FIDUCIAL1X2  [FIDUCIAL-1X2]  63.5,38.35 0 top
JP8  USB_SOLDER_PADS  [USB-SOLDER-PADS]  66.04,37.97 90 bottom
JP9  FIDUCIAL1X2  [FIDUCIAL-1X2]  94.74,8.26 0 top
JP10  FIDUCIAL1X2  [FIDUCIAL-1X2]  86.36,38.35 0 top
JP11  USB_SOLDER_PADS  [USB-SOLDER-PADS]  88.9,37.97 90 bottom
JP12  FIDUCIAL1X2  [FIDUCIAL-1X2]  117.6,8.26 0 top
JP13  FIDUCIAL1X2  [FIDUCIAL-1X2]  109.22,38.35 0 top
JP14  USB_SOLDER_PADS  [USB-SOLDER-PADS]  20.32,37.97 90 bottom
JP15  USB_SOLDER_PADS  [USB-SOLDER-PADS]  111.76,37.97 90 bottom
JP16  FIDUCIAL1X2  [FIDUCIAL-1X2]  26.16,52.7 0 top
JP17  FIDUCIAL1X2  [FIDUCIAL-1X2]  17.78,82.8 0 top
JP18  USB_SOLDER_PADS  [USB-SOLDER-PADS]  20.32,82.42 90 bottom
JP19  FIDUCIAL1X2  [FIDUCIAL-1X2]  49.02,52.7 0 top
JP20  FIDUCIAL1X2  [FIDUCIAL-1X2]  40.64,82.8 0 top
JP21  USB_SOLDER_PADS  [USB-SOLDER-PADS]  43.18,82.42 90 bottom
JP22  FIDUCIAL1X2  [FIDUCIAL-1X2]  71.88,52.7 0 top
JP23  FIDUCIAL1X2  [FIDUCIAL-1X2]  63.5,82.8 0 top
JP24  USB_SOLDER_PADS  [USB-SOLDER-PADS]  66.04,82.42 90 bottom
JP25  FIDUCIAL1X2  [FIDUCIAL-1X2]  94.74,52.7 0 top
JP26  FIDUCIAL1X2  [FIDUCIAL-1X2]  86.36,82.8 0 top
JP27  USB_SOLDER_PADS  [USB-SOLDER-PADS]  88.9,82.42 90 bottom
JP28  FIDUCIAL1X2  [FIDUCIAL-1X2]  117.6,52.7 0 top
JP29  FIDUCIAL1X2  [FIDUCIAL-1X2]  109.22,82.8 0 top
JP30  USB_SOLDER_PADS  [USB-SOLDER-PADS]  111.76,82.42 90 bottom
JP31  FIDUCIAL1X2  [FIDUCIAL-1X2]  26.16,97.16 0 top
JP32  FIDUCIAL1X2  [FIDUCIAL-1X2]  17.78,127.25 0 top
JP33  USB_SOLDER_PADS  [USB-SOLDER-PADS]  20.32,126.87 90 bottom
JP34  FIDUCIAL1X2  [FIDUCIAL-1X2]  49.02,97.16 0 top
JP35  FIDUCIAL1X2  [FIDUCIAL-1X2]  40.64,127.25 0 top
JP36  USB_SOLDER_PADS  [USB-SOLDER-PADS]  43.18,126.87 90 bottom
JP37  FIDUCIAL1X2  [FIDUCIAL-1X2]  71.88,97.16 0 top
JP38  FIDUCIAL1X2  [FIDUCIAL-1X2]  63.5,127.25 0 top
JP39  USB_SOLDER_PADS  [USB-SOLDER-PADS]  66.04,126.87 90 bottom
JP40  FIDUCIAL1X2  [FIDUCIAL-1X2]  94.74,97.16 0 top
JP41  FIDUCIAL1X2  [FIDUCIAL-1X2]  86.36,127.25 0 top
JP42  USB_SOLDER_PADS  [USB-SOLDER-PADS]  88.9,126.87 90 bottom
JP43  FIDUCIAL1X2  [FIDUCIAL-1X2]  117.6,97.16 0 top
JP44  FIDUCIAL1X2  [FIDUCIAL-1X2]  109.22,127.25 0 top
JP45  USB_SOLDER_PADS  [USB-SOLDER-PADS]  111.76,126.87 90 bottom
LED1  RED  [LED-0603]  13.33,37.85 0 top
LED2  RED  [LED-0603]  36.2,37.85 0 top
LED3  RED  [LED-0603]  59.05,37.85 0 top
LED4  RED  [LED-0603]  81.91,37.85 0 top
LED5  RED  [LED-0603]  104.78,37.85 0 top
LED6  RED  [LED-0603]  13.33,82.3 0 top
LED7  RED  [LED-0603]  36.2,82.3 0 top
LED8  RED  [LED-0603]  59.05,82.3 0 top
LED9  RED  [LED-0603]  81.91,82.3 0 top
LED10  RED  [LED-0603]  104.78,82.3 0 top
LED11  RED  [LED-0603]  13.33,126.75 0 top
LED12  RED  [LED-0603]  36.2,126.75 0 top
LED13  RED  [LED-0603]  59.05,126.75 0 top
LED14  RED  [LED-0603]  81.91,126.75 0 top
LED15  RED  [LED-0603]  104.78,126.75 0 top
LOGO1  SFE_LOGO_NAME_FLAME.1_INCH  [SFE_LOGO_NAME_FLAME_.1]  19.05,23.11 270 bottom
LOGO2  SFE_LOGO_NAME_FLAME.1_INCH  [SFE_LOGO_NAME_FLAME_.1]  41.91,23.11 270 bottom
LOGO3  QWIIC_LOGO_6MM  [QWIIC_6MM]  20.32,7.87 0 bottom
LOGO4  SFE_LOGO_FLAME.1_INCH  [SFE_LOGO_FLAME_.1]  16,23.75 0 top
LOGO5  QWIIC_LOGO_6MM  [QWIIC_6MM]  43.18,7.87 0 bottom
LOGO6  SFE_LOGO_FLAME.1_INCH  [SFE_LOGO_FLAME_.1]  38.86,23.75 0 top
LOGO7  SFE_LOGO_NAME_FLAME.1_INCH  [SFE_LOGO_NAME_FLAME_.1]  64.77,23.11 270 bottom
LOGO8  QWIIC_LOGO_6MM  [QWIIC_6MM]  66.04,7.87 0 bottom
LOGO9  SFE_LOGO_FLAME.1_INCH  [SFE_LOGO_FLAME_.1]  61.72,23.75 0 top
LOGO10  SFE_LOGO_NAME_FLAME.1_INCH  [SFE_LOGO_NAME_FLAME_.1]  87.63,23.11 270 bottom
LOGO11  QWIIC_LOGO_6MM  [QWIIC_6MM]  88.9,7.87 0 bottom
LOGO12  SFE_LOGO_FLAME.1_INCH  [SFE_LOGO_FLAME_.1]  84.58,23.75 0 top
LOGO13  SFE_LOGO_NAME_FLAME.1_INCH  [SFE_LOGO_NAME_FLAME_.1]  110.49,23.11 270 bottom
LOGO14  QWIIC_LOGO_6MM  [QWIIC_6MM]  111.76,7.87 0 bottom
LOGO15  SFE_LOGO_FLAME.1_INCH  [SFE_LOGO_FLAME_.1]  107.44,23.75 0 top
LOGO16  SFE_LOGO_NAME_FLAME.1_INCH  [SFE_LOGO_NAME_FLAME_.1]  19.05,67.56 270 bottom
LOGO17  QWIIC_LOGO_6MM  [QWIIC_6MM]  20.32,52.32 0 bottom
LOGO18  SFE_LOGO_FLAME.1_INCH  [SFE_LOGO_FLAME_.1]  16,68.2 0 top
LOGO19  SFE_LOGO_NAME_FLAME.1_INCH  [SFE_LOGO_NAME_FLAME_.1]  41.91,67.56 270 bottom
LOGO20  QWIIC_LOGO_6MM  [QWIIC_6MM]  43.18,52.32 0 bottom
LOGO21  SFE_LOGO_FLAME.1_INCH  [SFE_LOGO_FLAME_.1]  38.86,68.2 0 top
LOGO22  SFE_LOGO_NAME_FLAME.1_INCH  [SFE_LOGO_NAME_FLAME_.1]  64.77,67.56 270 bottom
LOGO23  QWIIC_LOGO_6MM  [QWIIC_6MM]  66.04,52.32 0 bottom
LOGO24  SFE_LOGO_FLAME.1_INCH  [SFE_LOGO_FLAME_.1]  61.72,68.2 0 top
LOGO25  SFE_LOGO_NAME_FLAME.1_INCH  [SFE_LOGO_NAME_FLAME_.1]  87.63,67.56 270 bottom
LOGO26  QWIIC_LOGO_6MM  [QWIIC_6MM]  88.9,52.32 0 bottom
LOGO27  SFE_LOGO_FLAME.1_INCH  [SFE_LOGO_FLAME_.1]  84.58,68.2 0 top
LOGO28  SFE_LOGO_NAME_FLAME.1_INCH  [SFE_LOGO_NAME_FLAME_.1]  110.49,67.56 270 bottom
LOGO29  QWIIC_LOGO_6MM  [QWIIC_6MM]  111.76,52.32 0 bottom
LOGO30  SFE_LOGO_FLAME.1_INCH  [SFE_LOGO_FLAME_.1]  107.44,68.2 0 top
LOGO31  SFE_LOGO_NAME_FLAME.1_INCH  [SFE_LOGO_NAME_FLAME_.1]  19.05,112.01 270 bottom
LOGO32  QWIIC_LOGO_6MM  [QWIIC_6MM]  20.32,96.77 0 bottom
LOGO33  SFE_LOGO_FLAME.1_INCH  [SFE_LOGO_FLAME_.1]  16,112.65 0 top
LOGO34  SFE_LOGO_NAME_FLAME.1_INCH  [SFE_LOGO_NAME_FLAME_.1]  41.91,112.01 270 bottom
LOGO35  QWIIC_LOGO_6MM  [QWIIC_6MM]  43.18,96.77 0 bottom
LOGO36  SFE_LOGO_FLAME.1_INCH  [SFE_LOGO_FLAME_.1]  38.86,112.65 0 top
LOGO37  SFE_LOGO_NAME_FLAME.1_INCH  [SFE_LOGO_NAME_FLAME_.1]  64.77,112.01 270 bottom
LOGO38  QWIIC_LOGO_6MM  [QWIIC_6MM]  66.04,96.77 0 bottom
LOGO39  SFE_LOGO_FLAME.1_INCH  [SFE_LOGO_FLAME_.1]  61.72,112.65 0 top
LOGO40  SFE_LOGO_NAME_FLAME.1_INCH  [SFE_LOGO_NAME_FLAME_.1]  87.63,112.01 270 bottom
LOGO41  QWIIC_LOGO_6MM  [QWIIC_6MM]  88.9,96.77 0 bottom
LOGO42  SFE_LOGO_FLAME.1_INCH  [SFE_LOGO_FLAME_.1]  84.58,112.65 0 top
LOGO43  SFE_LOGO_NAME_FLAME.1_INCH  [SFE_LOGO_NAME_FLAME_.1]  110.49,112.01 270 bottom
LOGO44  QWIIC_LOGO_6MM  [QWIIC_6MM]  111.76,96.77 0 bottom
LOGO45  SFE_LOGO_FLAME.1_INCH  [SFE_LOGO_FLAME_.1]  107.44,112.65 0 top
R1  5.1k  [0402-TIGHT]  15.49,36.45 270 top
R2  10k  [0402-TIGHT]  23.11,11.81 0 top
R3  5.1k  [0402-TIGHT]  25.15,36.45 270 top
R4  1k  [0402-TIGHT]  38.23,30.73 270 top
R5  2.2k  [0402-TIGHT]  23.11,13.59 0 top
R6  10k  [0402-TIGHT]  45.97,11.81 0 top
R7  2.2k  [0402-TIGHT]  23.11,12.7 0 top
R8  5.1k  [0402-TIGHT]  38.35,36.45 270 top
R9  5.1k  [0402-TIGHT]  48.01,36.45 270 top
R10  1k  [0402-TIGHT]  17.53,12.7 0 top
R11  1k  [0402-TIGHT]  15.37,30.73 270 top
R12  27  [0402-TIGHT]  25.4,32 270 top
R13  27  [0402-TIGHT]  24.13,32 270 top
R14  200  [0402-TIGHT]  24.77,24.89 270 top
R15  1k  [0402-TIGHT]  15.37,26.16 270 top
R16  10k  [0402-TIGHT]  15.37,28.19 90 top
R17  2.2k  [0402-TIGHT]  45.97,13.59 0 top
R18  2.2k  [0402-TIGHT]  45.97,12.7 0 top
R19  1k  [0402-TIGHT]  40.39,12.7 0 top
R20  27  [0402-TIGHT]  48.26,32 270 top
R21  27  [0402-TIGHT]  46.99,32 270 top
R22  200  [0402-TIGHT]  47.62,24.89 270 top
R23  1k  [0402-TIGHT]  38.23,26.16 270 top
R24  10k  [0402-TIGHT]  38.23,28.19 90 top
R25  1k  [0402-TIGHT]  61.09,30.73 270 top
R26  10k  [0402-TIGHT]  68.83,11.81 0 top
R27  5.1k  [0402-TIGHT]  61.21,36.45 270 top
R28  5.1k  [0402-TIGHT]  70.87,36.45 270 top
R29  2.2k  [0402-TIGHT]  68.83,13.59 0 top
R30  2.2k  [0402-TIGHT]  68.83,12.7 0 top
R31  1k  [0402-TIGHT]  63.25,12.7 0 top
R32  27  [0402-TIGHT]  71.12,32 270 top
R33  27  [0402-TIGHT]  69.85,32 270 top
R34  200  [0402-TIGHT]  70.48,24.89 270 top
R35  1k  [0402-TIGHT]  61.09,26.16 270 top
R36  10k  [0402-TIGHT]  61.09,28.19 90 top
R37  1k  [0402-TIGHT]  83.95,30.73 270 top
R38  10k  [0402-TIGHT]  91.69,11.81 0 top
R39  5.1k  [0402-TIGHT]  84.07,36.45 270 top
R40  5.1k  [0402-TIGHT]  93.73,36.45 270 top
R41  2.2k  [0402-TIGHT]  91.69,13.59 0 top
R42  2.2k  [0402-TIGHT]  91.69,12.7 0 top
R43  1k  [0402-TIGHT]  86.11,12.7 0 top
R44  27  [0402-TIGHT]  93.98,32 270 top
R45  27  [0402-TIGHT]  92.71,32 270 top
R46  200  [0402-TIGHT]  93.34,24.89 270 top
R47  1k  [0402-TIGHT]  83.95,26.16 270 top
R48  10k  [0402-TIGHT]  83.95,28.19 90 top
R49  1k  [0402-TIGHT]  106.81,30.73 270 top
R50  10k  [0402-TIGHT]  114.55,11.81 0 top
R51  5.1k  [0402-TIGHT]  106.93,36.45 270 top
R52  5.1k  [0402-TIGHT]  116.59,36.45 270 top
R53  2.2k  [0402-TIGHT]  114.55,13.59 0 top
R54  2.2k  [0402-TIGHT]  114.55,12.7 0 top
R55  1k  [0402-TIGHT]  108.97,12.7 0 top
R56  27  [0402-TIGHT]  116.84,32 270 top
R57  27  [0402-TIGHT]  115.57,32 270 top
R58  200  [0402-TIGHT]  116.21,24.89 270 top
R59  1k  [0402-TIGHT]  106.81,26.16 270 top
R60  10k  [0402-TIGHT]  106.81,28.19 90 top
R61  1k  [0402-TIGHT]  15.37,75.18 270 top
R62  10k  [0402-TIGHT]  23.11,56.26 0 top
R63  5.1k  [0402-TIGHT]  15.49,80.9 270 top
R64  5.1k  [0402-TIGHT]  25.15,80.9 270 top
R65  2.2k  [0402-TIGHT]  23.11,58.04 0 top
R66  2.2k  [0402-TIGHT]  23.11,57.15 0 top
R67  1k  [0402-TIGHT]  17.53,57.15 0 top
R68  27  [0402-TIGHT]  25.4,76.45 270 top
R69  27  [0402-TIGHT]  24.13,76.45 270 top
R70  200  [0402-TIGHT]  24.77,69.34 270 top
R71  1k  [0402-TIGHT]  15.37,70.61 270 top
R72  10k  [0402-TIGHT]  15.37,72.64 90 top
R73  1k  [0402-TIGHT]  38.23,75.18 270 top
R74  10k  [0402-TIGHT]  45.97,56.26 0 top
R75  5.1k  [0402-TIGHT]  38.35,80.9 270 top
R76  5.1k  [0402-TIGHT]  48.01,80.9 270 top
R77  2.2k  [0402-TIGHT]  45.97,58.04 0 top
R78  2.2k  [0402-TIGHT]  45.97,57.15 0 top
R79  1k  [0402-TIGHT]  40.39,57.15 0 top
R80  27  [0402-TIGHT]  48.26,76.45 270 top
R81  27  [0402-TIGHT]  46.99,76.45 270 top
R82  200  [0402-TIGHT]  47.62,69.34 270 top
R83  1k  [0402-TIGHT]  38.23,70.61 270 top
R84  10k  [0402-TIGHT]  38.23,72.64 90 top
R85  1k  [0402-TIGHT]  61.09,75.18 270 top
R86  10k  [0402-TIGHT]  68.83,56.26 0 top
R87  5.1k  [0402-TIGHT]  61.21,80.9 270 top
R88  5.1k  [0402-TIGHT]  70.87,80.9 270 top
R89  2.2k  [0402-TIGHT]  68.83,58.04 0 top
R90  2.2k  [0402-TIGHT]  68.83,57.15 0 top
R91  1k  [0402-TIGHT]  63.25,57.15 0 top
R92  27  [0402-TIGHT]  71.12,76.45 270 top
R93  27  [0402-TIGHT]  69.85,76.45 270 top
R94  200  [0402-TIGHT]  70.48,69.34 270 top
R95  1k  [0402-TIGHT]  61.09,70.61 270 top
R96  10k  [0402-TIGHT]  61.09,72.64 90 top
R97  1k  [0402-TIGHT]  83.95,75.18 270 top
R98  10k  [0402-TIGHT]  91.69,56.26 0 top
R99  5.1k  [0402-TIGHT]  84.07,80.9 270 top
R100  5.1k  [0402-TIGHT]  93.73,80.9 270 top
R101  2.2k  [0402-TIGHT]  91.69,58.04 0 top
R102  2.2k  [0402-TIGHT]  91.69,57.15 0 top
R103  1k  [0402-TIGHT]  86.11,57.15 0 top
R104  27  [0402-TIGHT]  93.98,76.45 270 top
R105  27  [0402-TIGHT]  92.71,76.45 270 top
R106  200  [0402-TIGHT]  93.34,69.34 270 top
R107  1k  [0402-TIGHT]  83.95,70.61 270 top
R108  10k  [0402-TIGHT]  83.95,72.64 90 top
R109  1k  [0402-TIGHT]  106.81,75.18 270 top
R110  10k  [0402-TIGHT]  114.55,56.26 0 top
R111  5.1k  [0402-TIGHT]  106.93,80.9 270 top
R112  5.1k  [0402-TIGHT]  116.59,80.9 270 top
R113  2.2k  [0402-TIGHT]  114.55,58.04 0 top
R114  2.2k  [0402-TIGHT]  114.55,57.15 0 top
R115  1k  [0402-TIGHT]  108.97,57.15 0 top
R116  27  [0402-TIGHT]  116.84,76.45 270 top
R117  27  [0402-TIGHT]  115.57,76.45 270 top
R118  200  [0402-TIGHT]  116.21,69.34 270 top
R119  1k  [0402-TIGHT]  106.81,70.61 270 top
R120  10k  [0402-TIGHT]  106.81,72.64 90 top
R121  1k  [0402-TIGHT]  15.37,119.63 270 top
R122  10k  [0402-TIGHT]  23.11,100.71 0 top
R123  5.1k  [0402-TIGHT]  15.49,125.35 270 top
R124  5.1k  [0402-TIGHT]  25.15,125.35 270 top
R125  2.2k  [0402-TIGHT]  23.11,102.49 0 top
R126  2.2k  [0402-TIGHT]  23.11,101.6 0 top
R127  1k  [0402-TIGHT]  17.53,101.6 0 top
R128  27  [0402-TIGHT]  25.4,120.9 270 top
R129  27  [0402-TIGHT]  24.13,120.9 270 top
R130  200  [0402-TIGHT]  24.77,113.79 270 top
R131  1k  [0402-TIGHT]  15.37,115.06 270 top
R132  10k  [0402-TIGHT]  15.37,117.09 90 top
R133  1k  [0402-TIGHT]  38.23,119.63 270 top
R134  10k  [0402-TIGHT]  45.97,100.71 0 top
R135  5.1k  [0402-TIGHT]  38.35,125.35 270 top
R136  5.1k  [0402-TIGHT]  48.01,125.35 270 top
R137  2.2k  [0402-TIGHT]  45.97,102.49 0 top
R138  2.2k  [0402-TIGHT]  45.97,101.6 0 top
R139  1k  [0402-TIGHT]  40.39,101.6 0 top
R140  27  [0402-TIGHT]  48.26,120.9 270 top
R141  27  [0402-TIGHT]  46.99,120.9 270 top
R142  200  [0402-TIGHT]  47.62,113.79 270 top
R143  1k  [0402-TIGHT]  38.23,115.06 270 top
R144  10k  [0402-TIGHT]  38.23,117.09 90 top
R145  1k  [0402-TIGHT]  61.09,119.63 270 top
R146  10k  [0402-TIGHT]  68.83,100.71 0 top
R147  5.1k  [0402-TIGHT]  61.21,125.35 270 top
R148  5.1k  [0402-TIGHT]  70.87,125.35 270 top
R149  2.2k  [0402-TIGHT]  68.83,102.49 0 top
R150  2.2k  [0402-TIGHT]  68.83,101.6 0 top
R151  1k  [0402-TIGHT]  63.25,101.6 0 top
R152  27  [0402-TIGHT]  71.12,120.9 270 top
R153  27  [0402-TIGHT]  69.85,120.9 270 top
R154  200  [0402-TIGHT]  70.48,113.79 270 top
R155  1k  [0402-TIGHT]  61.09,115.06 270 top
R156  10k  [0402-TIGHT]  61.09,117.09 90 top
R157  1k  [0402-TIGHT]  83.95,119.63 270 top
R158  10k  [0402-TIGHT]  91.69,100.71 0 top
R159  5.1k  [0402-TIGHT]  84.07,125.35 270 top
R160  5.1k  [0402-TIGHT]  93.73,125.35 270 top
R161  2.2k  [0402-TIGHT]  91.69,102.49 0 top
R162  2.2k  [0402-TIGHT]  91.69,101.6 0 top
R163  1k  [0402-TIGHT]  86.11,101.6 0 top
R164  27  [0402-TIGHT]  93.98,120.9 270 top
R165  27  [0402-TIGHT]  92.71,120.9 270 top
R166  200  [0402-TIGHT]  93.34,113.79 270 top
R167  1k  [0402-TIGHT]  83.95,115.06 270 top
R168  10k  [0402-TIGHT]  83.95,117.09 90 top
R169  1k  [0402-TIGHT]  106.81,119.63 270 top
R170  10k  [0402-TIGHT]  114.55,100.71 0 top
R171  5.1k  [0402-TIGHT]  106.93,125.35 270 top
R172  5.1k  [0402-TIGHT]  116.59,125.35 270 top
R173  2.2k  [0402-TIGHT]  114.55,102.49 0 top
R174  2.2k  [0402-TIGHT]  114.55,101.6 0 top
R175  1k  [0402-TIGHT]  108.97,101.6 0 top
R176  27  [0402-TIGHT]  116.84,120.9 270 top
R177  27  [0402-TIGHT]  115.57,120.9 270 top
R178  200  [0402-TIGHT]  116.21,113.79 270 top
R179  1k  [0402-TIGHT]  106.81,115.06 270 top
R180  10k  [0402-TIGHT]  106.81,117.09 90 top
S1  Reset  [TACTILE_SWITCH_SMD_4.6X2.8MM]  25.4,9.14 90 top
S2  Boot  [TACTILE_SWITCH_SMD_4.6X2.8MM]  15.24,9.14 90 top
S3  Reset  [TACTILE_SWITCH_SMD_4.6X2.8MM]  48.26,9.14 90 top
S4  Boot  [TACTILE_SWITCH_SMD_4.6X2.8MM]  38.1,9.14 90 top
S5  Reset  [TACTILE_SWITCH_SMD_4.6X2.8MM]  71.12,9.14 90 top
S6  Boot  [TACTILE_SWITCH_SMD_4.6X2.8MM]  60.96,9.14 90 top
S7  Reset  [TACTILE_SWITCH_SMD_4.6X2.8MM]  93.98,9.14 90 top
S8  Boot  [TACTILE_SWITCH_SMD_4.6X2.8MM]  83.82,9.14 90 top
S9  Reset  [TACTILE_SWITCH_SMD_4.6X2.8MM]  116.84,9.14 90 top
S10  Boot  [TACTILE_SWITCH_SMD_4.6X2.8MM]  106.68,9.14 90 top
S11  Reset  [TACTILE_SWITCH_SMD_4.6X2.8MM]  25.4,53.59 90 top
S12  Boot  [TACTILE_SWITCH_SMD_4.6X2.8MM]  15.24,53.59 90 top
S13  Reset  [TACTILE_SWITCH_SMD_4.6X2.8MM]  48.26,53.59 90 top
S14  Boot  [TACTILE_SWITCH_SMD_4.6X2.8MM]  38.1,53.59 90 top
S15  Reset  [TACTILE_SWITCH_SMD_4.6X2.8MM]  71.12,53.59 90 top
S16  Boot  [TACTILE_SWITCH_SMD_4.6X2.8MM]  60.96,53.59 90 top
S17  Reset  [TACTILE_SWITCH_SMD_4.6X2.8MM]  93.98,53.59 90 top
S18  Boot  [TACTILE_SWITCH_SMD_4.6X2.8MM]  83.82,53.59 90 top
S19  Reset  [TACTILE_SWITCH_SMD_4.6X2.8MM]  116.84,53.59 90 top
S20  Boot  [TACTILE_SWITCH_SMD_4.6X2.8MM]  106.68,53.59 90 top
S21  Reset  [TACTILE_SWITCH_SMD_4.6X2.8MM]  25.4,98.04 90 top
S22  Boot  [TACTILE_SWITCH_SMD_4.6X2.8MM]  15.24,98.04 90 top
S23  Reset  [TACTILE_SWITCH_SMD_4.6X2.8MM]  48.26,98.04 90 top
S24  Boot  [TACTILE_SWITCH_SMD_4.6X2.8MM]  38.1,98.04 90 top
S25  Reset  [TACTILE_SWITCH_SMD_4.6X2.8MM]  71.12,98.04 90 top
S26  Boot  [TACTILE_SWITCH_SMD_4.6X2.8MM]  60.96,98.04 90 top
S27  Reset  [TACTILE_SWITCH_SMD_4.6X2.8MM]  93.98,98.04 90 top
S28  Boot  [TACTILE_SWITCH_SMD_4.6X2.8MM]  83.82,98.04 90 top
S29  Reset  [TACTILE_SWITCH_SMD_4.6X2.8MM]  116.84,98.04 90 top
S30  Boot  [TACTILE_SWITCH_SMD_4.6X2.8MM]  106.68,98.04 90 top
TP1  [PAD.03X.05]  19.05,12.95 0 bottom
TP2  [PAD.03X.05]  21.59,12.95 0 bottom
TP3  [PAD.03X.05]  27.94,38.35 0 bottom
TP4  [PAD.03X.05]  41.91,12.95 0 bottom
TP5  [PAD.03X.05]  44.45,12.95 0 bottom
TP6  [PAD.03X.05]  50.8,38.35 0 bottom
TP7  [PAD.03X.05]  64.77,12.95 0 bottom
TP8  [PAD.03X.05]  67.31,12.95 0 bottom
TP9  [PAD.03X.05]  73.66,38.35 0 bottom
TP10  [PAD.03X.05]  87.63,12.95 0 bottom
TP11  [PAD.03X.05]  90.17,12.95 0 bottom
TP12  [PAD.03X.05]  96.52,38.35 0 bottom
TP13  [PAD.03X.05]  110.49,12.95 0 bottom
TP14  [PAD.03X.05]  113.03,12.95 0 bottom
TP15  [PAD.03X.05]  119.38,38.35 0 bottom
TP16  [PAD.03X.05]  19.05,57.4 0 bottom
TP17  [PAD.03X.05]  21.59,57.4 0 bottom
TP18  [PAD.03X.05]  27.94,82.8 0 bottom
TP19  [PAD.03X.05]  41.91,57.4 0 bottom
TP20  [PAD.03X.05]  44.45,57.4 0 bottom
TP21  [PAD.03X.05]  50.8,82.8 0 bottom
TP22  [PAD.03X.05]  64.77,57.4 0 bottom
TP23  [PAD.03X.05]  67.31,57.4 0 bottom
TP24  [PAD.03X.05]  73.66,82.8 0 bottom
TP25  [PAD.03X.05]  87.63,57.4 0 bottom
TP26  [PAD.03X.05]  90.17,57.4 0 bottom
TP27  [PAD.03X.05]  96.52,82.8 0 bottom
TP28  [PAD.03X.05]  110.49,57.4 0 bottom
TP29  [PAD.03X.05]  113.03,57.4 0 bottom
TP30  [PAD.03X.05]  119.38,82.8 0 bottom
TP31  [PAD.03X.05]  19.05,101.85 0 bottom
TP32  [PAD.03X.05]  21.59,101.85 0 bottom
TP33  [PAD.03X.05]  27.94,127.25 0 bottom
TP34  [PAD.03X.05]  41.91,101.85 0 bottom
TP35  [PAD.03X.05]  44.45,101.85 0 bottom
TP36  [PAD.03X.05]  50.8,127.25 0 bottom
TP37  [PAD.03X.05]  64.77,101.85 0 bottom
TP38  [PAD.03X.05]  67.31,101.85 0 bottom
TP39  [PAD.03X.05]  73.66,127.25 0 bottom
TP40  [PAD.03X.05]  87.63,101.85 0 bottom
TP41  [PAD.03X.05]  90.17,101.85 0 bottom
TP42  [PAD.03X.05]  96.52,127.25 0 bottom
TP43  [PAD.03X.05]  110.49,101.85 0 bottom
TP44  [PAD.03X.05]  113.03,101.85 0 bottom
TP45  [PAD.03X.05]  119.38,127.25 0 bottom
U1  3.3V  [SOT23-5]  20.32,30.73 180 top
U2  RP2040  [QFN-56]  20.32,18.03 0 top
U3  WS2812-2020  [WS2812-2020]  27.03,38.1 90 top
U4  W25QXX128MBIT  [WSON-8-6X5-SKINNY_CENTERPAD]  20.32,25.91 0 top
U5  3.3V  [SOT23-5]  43.18,30.73 180 top
U6  RP2040  [QFN-56]  43.18,18.03 0 top
U7  W25QXX128MBIT  [WSON-8-6X5-SKINNY_CENTERPAD]  43.18,25.91 0 top
U8  WS2812-2020  [WS2812-2020]  49.89,38.1 90 top
U9  3.3V  [SOT23-5]  66.04,30.73 180 top
U10  RP2040  [QFN-56]  66.04,18.03 0 top
U11  W25QXX128MBIT  [WSON-8-6X5-SKINNY_CENTERPAD]  66.04,25.91 0 top
U12  WS2812-2020  [WS2812-2020]  72.75,38.1 90 top
U13  3.3V  [SOT23-5]  88.9,30.73 180 top
U14  RP2040  [QFN-56]  88.9,18.03 0 top
U15  W25QXX128MBIT  [WSON-8-6X5-SKINNY_CENTERPAD]  88.9,25.91 0 top
U16  WS2812-2020  [WS2812-2020]  95.61,38.1 90 top
U17  3.3V  [SOT23-5]  111.76,30.73 180 top
U18  RP2040  [QFN-56]  111.76,18.03 0 top
U19  W25QXX128MBIT  [WSON-8-6X5-SKINNY_CENTERPAD]  111.76,25.91 0 top
U20  WS2812-2020  [WS2812-2020]  118.47,38.1 90 top
U21  3.3V  [SOT23-5]  20.32,75.18 180 top
U22  RP2040  [QFN-56]  20.32,62.48 0 top
U23  W25QXX128MBIT  [WSON-8-6X5-SKINNY_CENTERPAD]  20.32,70.36 0 top
U24  WS2812-2020  [WS2812-2020]  27.03,82.55 90 top
U25  3.3V  [SOT23-5]  43.18,75.18 180 top
U26  RP2040  [QFN-56]  43.18,62.48 0 top
U27  W25QXX128MBIT  [WSON-8-6X5-SKINNY_CENTERPAD]  43.18,70.36 0 top
U28  WS2812-2020  [WS2812-2020]  49.89,82.55 90 top
U29  3.3V  [SOT23-5]  66.04,75.18 180 top
U30  RP2040  [QFN-56]  66.04,62.48 0 top
U31  W25QXX128MBIT  [WSON-8-6X5-SKINNY_CENTERPAD]  66.04,70.36 0 top
U32  WS2812-2020  [WS2812-2020]  72.75,82.55 90 top
U33  3.3V  [SOT23-5]  88.9,75.18 180 top
U34  RP2040  [QFN-56]  88.9,62.48 0 top
U35  W25QXX128MBIT  [WSON-8-6X5-SKINNY_CENTERPAD]  88.9,70.36 0 top
U36  WS2812-2020  [WS2812-2020]  95.61,82.55 90 top
U37  3.3V  [SOT23-5]  111.76,75.18 180 top
U38  RP2040  [QFN-56]  111.76,62.48 0 top
U39  W25QXX128MBIT  [WSON-8-6X5-SKINNY_CENTERPAD]  111.76,70.36 0 top
U40  WS2812-2020  [WS2812-2020]  118.47,82.55 90 top
U41  3.3V  [SOT23-5]  20.32,119.63 180 top
U42  RP2040  [QFN-56]  20.32,106.93 0 top
U43  W25QXX128MBIT  [WSON-8-6X5-SKINNY_CENTERPAD]  20.32,114.81 0 top
U44  WS2812-2020  [WS2812-2020]  27.03,127 90 top
U45  3.3V  [SOT23-5]  43.18,119.63 180 top
U46  RP2040  [QFN-56]  43.18,106.93 0 top
U47  W25QXX128MBIT  [WSON-8-6X5-SKINNY_CENTERPAD]  43.18,114.81 0 top
U48  WS2812-2020  [WS2812-2020]  49.89,127 90 top
U49  3.3V  [SOT23-5]  66.04,119.63 180 top
U50  RP2040  [QFN-56]  66.04,106.93 0 top
U51  W25QXX128MBIT  [WSON-8-6X5-SKINNY_CENTERPAD]  66.04,114.81 0 top
U52  WS2812-2020  [WS2812-2020]  72.75,127 90 top
U53  3.3V  [SOT23-5]  88.9,119.63 180 top
U54  RP2040  [QFN-56]  88.9,106.93 0 top
U55  W25QXX128MBIT  [WSON-8-6X5-SKINNY_CENTERPAD]  88.9,114.81 0 top
U56  WS2812-2020  [WS2812-2020]  95.61,127 90 top
U57  3.3V  [SOT23-5]  111.76,119.63 180 top
U58  RP2040  [QFN-56]  111.76,106.93 0 top
U59  W25QXX128MBIT  [WSON-8-6X5-SKINNY_CENTERPAD]  111.76,114.81 0 top
U60  WS2812-2020  [WS2812-2020]  118.47,127 90 top
U$1  [A00]  26.42,18.16 90 top
U$2  [GND_0]  26.42,33.4 90 top
U$3  OSHW-LOGOMINI  [OSHW-LOGO-MINI]  12.95,38.1 0 bottom
U$4  [PRO_MICRO0]  20.83,21.08 270 bottom
U$5  [#0]  26.53,35.8 0 top
U$6  [70]  14.1,12.95 0 bottom
U$7  [81]  14.1,10.41 0 bottom
U$8  [92]  14.1,7.87 0 bottom
U$9  [CI4]  26.16,12.95 0 bottom
U$10  [SCK3]  25.53,15.49 0 bottom
U$11  [A00]  25.91,18.03 0 bottom
U$12  [A10]  26.04,20.57 0 bottom
U$13  [A21]  25.91,23.11 0 bottom
U$14  [A32]  25.91,25.65 0 bottom
U$15  [GND2]  26.42,33.27 270 bottom
U$16  [3V3_0]  25.15,28.19 0 bottom
U$17  [RAW0]  25.53,35.81 0 bottom
U$18  [C0]  18.92,11.56 0 bottom
U$19  [TX0]  14.22,35.81 270 bottom
U$20  [A10]  26.42,20.7 90 top
U$21  [RX1]  14.22,33.27 270 bottom
U$22  [GND2]  14.35,29.46 270 bottom
U$23  [20]  14.1,25.65 0 bottom
U$24  [31]  14.1,23.11 0 bottom
U$25  [42]  14.1,20.57 0 bottom
U$26  [53]  14.1,18.03 0 bottom
U$27  [64]  14.1,15.62 0 bottom
U$28  [D#1]  19.43,35.31 270 bottom
U$29  [D#2]  21.21,35.31 270 bottom
U$30  [G0]  17.65,35.69 270 bottom
U$31  [V3]  22.99,35.56 270 bottom
U$32  [210]  26.04,7.87 0 bottom
U$33  [A21]  26.42,23.24 90 top
U$34  [#RST#0]  25.27,30.73 0 bottom
U$35  [D1]  21.46,11.56 0 bottom
U$36  [B0]  15.29,11.76 0 top
U$37  [R0]  25.45,12.01 0 top
U$38  [RP20401]  22.86,20.96 270 bottom
U$39  [A32]  26.42,25.78 90 top
U$40  [DO0]  26.42,38.23 270 bottom
U$41  OSHW-LOGOMINI  [OSHW-LOGO-MINI]  35.81,38.1 0 bottom
U$42  [A00]  49.28,18.16 90 top
U$43  [A10]  49.28,20.7 90 top
U$44  [A21]  49.28,23.24 90 top
U$45  [A32]  49.28,25.78 90 top
U$46  [CI4]  49.28,12.95 90 top
U$47  [CO5]  48.64,10.41 0 bottom
U$48  [SCK3]  49.28,15.49 90 top
U$49  [20]  37.08,25.53 270 top
U$50  [31]  37.08,22.99 270 top
U$51  [42]  37.08,20.45 270 top
U$52  [53]  37.08,17.91 270 top
U$53  [20]  14.22,25.53 270 top
U$54  [31]  14.22,22.99 270 top
U$55  [42]  14.22,20.45 270 top
U$56  [53]  14.22,17.91 270 top
U$57  [64]  14.22,15.37 270 top
U$58  [64]  37.08,15.37 270 top
U$59  [#RST#1]  49.19,30.7 90 top
U$60  [3V30]  49.28,28.19 90 top
U$61  [PWR0]  36.19,38.9 0 top
U$62  [GND2]  37.08,29.46 270 top
U$63  [RX1]  37.08,33.27 270 top
U$64  [CI4]  26.42,12.95 90 top
U$65  [TX0]  37.08,35.81 270 top
U$66  [CO5]  25.78,10.41 0 bottom
U$67  [SCK3]  26.42,15.49 90 top
U$68  [#RST#1]  26.33,30.7 90 top
U$69  [3V30]  26.42,28.19 90 top
U$70  [GND_0]  49.28,33.4 90 top
U$71  [70]  36.96,12.95 0 bottom
U$72  [81]  36.96,10.41 0 bottom
U$73  [PWR0]  13.33,38.9 0 top
U$74  [GND2]  14.22,29.46 270 top
U$75  [RX1]  14.22,33.27 270 top
U$76  [TX0]  14.22,35.81 270 top
U$77  [92]  36.96,7.87 0 bottom
U$78  [CI4]  49.02,12.95 0 bottom
U$79  [SCK3]  48.39,15.49 0 bottom
U$80  [A00]  48.77,18.03 0 bottom
U$81  [A10]  48.9,20.57 0 bottom
U$82  [A21]  48.77,23.11 0 bottom
U$83  [A32]  48.77,25.65 0 bottom
U$84  [TX0]  37.08,35.81 270 bottom
U$85  [RX1]  37.08,33.27 270 bottom
U$86  [GND2]  37.21,29.46 270 bottom
U$87  [20]  36.96,25.65 0 bottom
U$88  [31]  36.96,23.11 0 bottom
U$89  [42]  36.96,20.57 0 bottom
U$90  [53]  36.96,18.03 0 bottom
U$91  [64]  36.96,15.62 0 bottom
U$92  [D#1]  42.29,35.31 270 bottom
U$93  [D#2]  44.07,35.31 270 bottom
U$94  [G0]  40.51,35.69 270 bottom
U$95  [V3]  45.85,35.56 270 bottom
U$96  [210]  48.9,7.87 0 bottom
U$97  [#RST#0]  48.13,30.73 0 bottom
U$98  [3V3_0]  48.01,28.19 0 bottom
U$99  [GND2]  49.28,33.27 270 bottom
U$100  [RAW0]  48.39,35.81 0 bottom
U$101  [B0]  38.15,11.76 0 top
U$102  [R0]  48.31,12.01 0 top
U$103  [#0]  49.39,35.8 0 top
U$104  [PRO_MICRO0]  43.69,21.08 270 bottom
U$105  [RP20401]  45.72,20.96 270 bottom
U$106  [C0]  41.78,11.56 0 bottom
U$107  [D1]  44.32,11.56 0 bottom
U$108  [DO0]  49.28,38.23 270 bottom
U$109  OSHW-LOGOMINI  [OSHW-LOGO-MINI]  58.67,38.1 0 bottom
U$110  [A00]  72.14,18.16 90 top
U$111  [A10]  72.14,20.7 90 top
U$112  [A21]  72.14,23.24 90 top
U$113  [A32]  72.14,25.78 90 top
U$114  [CI4]  72.14,12.95 90 top
U$115  [CO5]  71.5,10.41 0 bottom
U$116  [SCK3]  72.14,15.49 90 top
U$117  [20]  59.94,25.53 270 top
U$118  [31]  59.94,22.99 270 top
U$119  [42]  59.94,20.45 270 top
U$120  [53]  59.94,17.91 270 top
U$121  [64]  59.94,15.37 270 top
U$122  [#RST#1]  72.05,30.7 90 top
U$123  [3V30]  72.14,28.19 90 top
U$124  [PWR0]  59.05,38.9 0 top
U$125  [GND2]  59.94,29.46 270 top
U$126  [RX1]  59.94,33.27 270 top
U$127  [TX0]  59.94,35.81 270 top
U$128  [GND_0]  72.14,33.4 90 top
U$129  [70]  59.82,12.95 0 bottom
U$130  [81]  59.82,10.41 0 bottom
U$131  [92]  59.82,7.87 0 bottom
U$132  [CI4]  71.88,12.95 0 bottom
U$133  [SCK3]  71.25,15.49 0 bottom
U$134  [A00]  71.63,18.03 0 bottom
U$135  [A10]  71.75,20.57 0 bottom
U$136  [A21]  71.63,23.11 0 bottom
U$137  [A32]  71.63,25.65 0 bottom
U$138  [TX0]  59.94,35.81 270 bottom
U$139  [RX1]  59.94,33.27 270 bottom
U$140  [GND2]  60.07,29.46 270 bottom
U$141  [20]  59.82,25.65 0 bottom
U$142  [31]  59.82,23.11 0 bottom
U$143  [42]  59.82,20.57 0 bottom
U$144  [53]  59.82,18.03 0 bottom
U$145  [64]  59.82,15.62 0 bottom
U$146  [D#1]  65.15,35.31 270 bottom
U$147  [D#2]  66.93,35.31 270 bottom
U$148  [G0]  63.37,35.69 270 bottom
U$149  [V3]  68.71,35.56 270 bottom
U$150  [210]  71.75,7.87 0 bottom
U$151  [#RST#0]  70.99,30.73 0 bottom
U$152  [3V3_0]  70.87,28.19 0 bottom
U$153  [GND2]  72.14,33.27 270 bottom
U$154  [RAW0]  71.25,35.81 0 bottom
U$155  [B0]  61.01,11.76 0 top
U$156  [R0]  71.17,12.01 0 top
U$157  [#0]  72.25,35.8 0 top
U$158  [PRO_MICRO0]  66.55,21.08 270 bottom
U$159  [RP20401]  68.58,20.96 270 bottom
U$160  [C0]  64.64,11.56 0 bottom
U$161  [D1]  67.18,11.56 0 bottom
U$162  [DO0]  72.14,38.23 270 bottom
U$163  OSHW-LOGOMINI  [OSHW-LOGO-MINI]  81.53,38.1 0 bottom
U$164  [A00]  95,18.16 90 top
U$165  [A10]  95,20.7 90 top
U$166  [A21]  95,23.24 90 top
U$167  [A32]  95,25.78 90 top
U$168  [CI4]  95,12.95 90 top
U$169  [CO5]  94.36,10.41 0 bottom
U$170  [SCK3]  95,15.49 90 top
U$171  [20]  82.8,25.53 270 top
U$172  [31]  82.8,22.99 270 top
U$173  [42]  82.8,20.45 270 top
U$174  [53]  82.8,17.91 270 top
U$175  [64]  82.8,15.37 270 top
U$176  [#RST#1]  94.91,30.7 90 top
U$177  [3V30]  95,28.19 90 top
U$178  [PWR0]  81.91,38.9 0 top
U$179  [GND2]  82.8,29.46 270 top
U$180  [RX1]  82.8,33.27 270 top
U$181  [TX0]  82.8,35.81 270 top
U$182  [GND_0]  95,33.4 90 top
U$183  [70]  82.68,12.95 0 bottom
U$184  [81]  82.68,10.41 0 bottom
U$185  [92]  82.68,7.87 0 bottom
U$186  [CI4]  94.74,12.95 0 bottom
U$187  [SCK3]  94.11,15.49 0 bottom
U$188  [A00]  94.49,18.03 0 bottom
U$189  [A10]  94.62,20.57 0 bottom
U$190  [A21]  94.49,23.11 0 bottom
U$191  [A32]  94.49,25.65 0 bottom
U$192  [TX0]  82.8,35.81 270 bottom
U$193  [RX1]  82.8,33.27 270 bottom
U$194  [GND2]  82.93,29.46 270 bottom
U$195  [20]  82.68,25.65 0 bottom
U$196  [31]  82.68,23.11 0 bottom
U$197  [42]  82.68,20.57 0 bottom
U$198  [53]  82.68,18.03 0 bottom
U$199  [64]  82.68,15.62 0 bottom
U$200  [D#1]  88.01,35.31 270 bottom
U$201  [D#2]  89.79,35.31 270 bottom
U$202  [G0]  86.23,35.69 270 bottom
U$203  [V3]  91.57,35.56 270 bottom
U$204  [210]  94.62,7.87 0 bottom
U$205  [#RST#0]  93.85,30.73 0 bottom
U$206  [3V3_0]  93.73,28.19 0 bottom
U$207  [GND2]  95,33.27 270 bottom
U$208  [RAW0]  94.11,35.81 0 bottom
U$209  [B0]  83.87,11.76 0 top
U$210  [R0]  94.03,12.01 0 top
U$211  [#0]  95.11,35.8 0 top
U$212  [PRO_MICRO0]  89.41,21.08 270 bottom
U$213  [RP20401]  91.44,20.96 270 bottom
U$214  [C0]  87.5,11.56 0 bottom
U$215  [D1]  90.04,11.56 0 bottom
U$216  [DO0]  95,38.23 270 bottom
U$217  OSHW-LOGOMINI  [OSHW-LOGO-MINI]  104.39,38.1 0 bottom
U$218  [A00]  117.86,18.16 90 top
U$219  [A10]  117.86,20.7 90 top
U$220  [A21]  117.86,23.24 90 top
U$221  [A32]  117.86,25.78 90 top
U$222  [CI4]  117.86,12.95 90 top
U$223  [CO5]  117.22,10.41 0 bottom
U$224  [SCK3]  117.86,15.49 90 top
U$225  [20]  105.66,25.53 270 top
U$226  [31]  105.66,22.99 270 top